# Altium PCB 175-00029 rev3, 486 CCD Interface.PcbDoc
Units mil, origin at the board's own origin, x right, y up, seen from the top; angles counter-clockwise.
Board outline 2440.94 x 2590.55 mil, 6 copper layers (Top Layer (*.GTL), Mid-Layer 1  (*.G1), Internal Plane 1 (*.GP1), Mid-Layer 2 (*.G2), Internal Plane 2 (*.GP2), Bottom Layer (*.GBL)); 44 components, 41 nets, 233 pads, 100 vias.
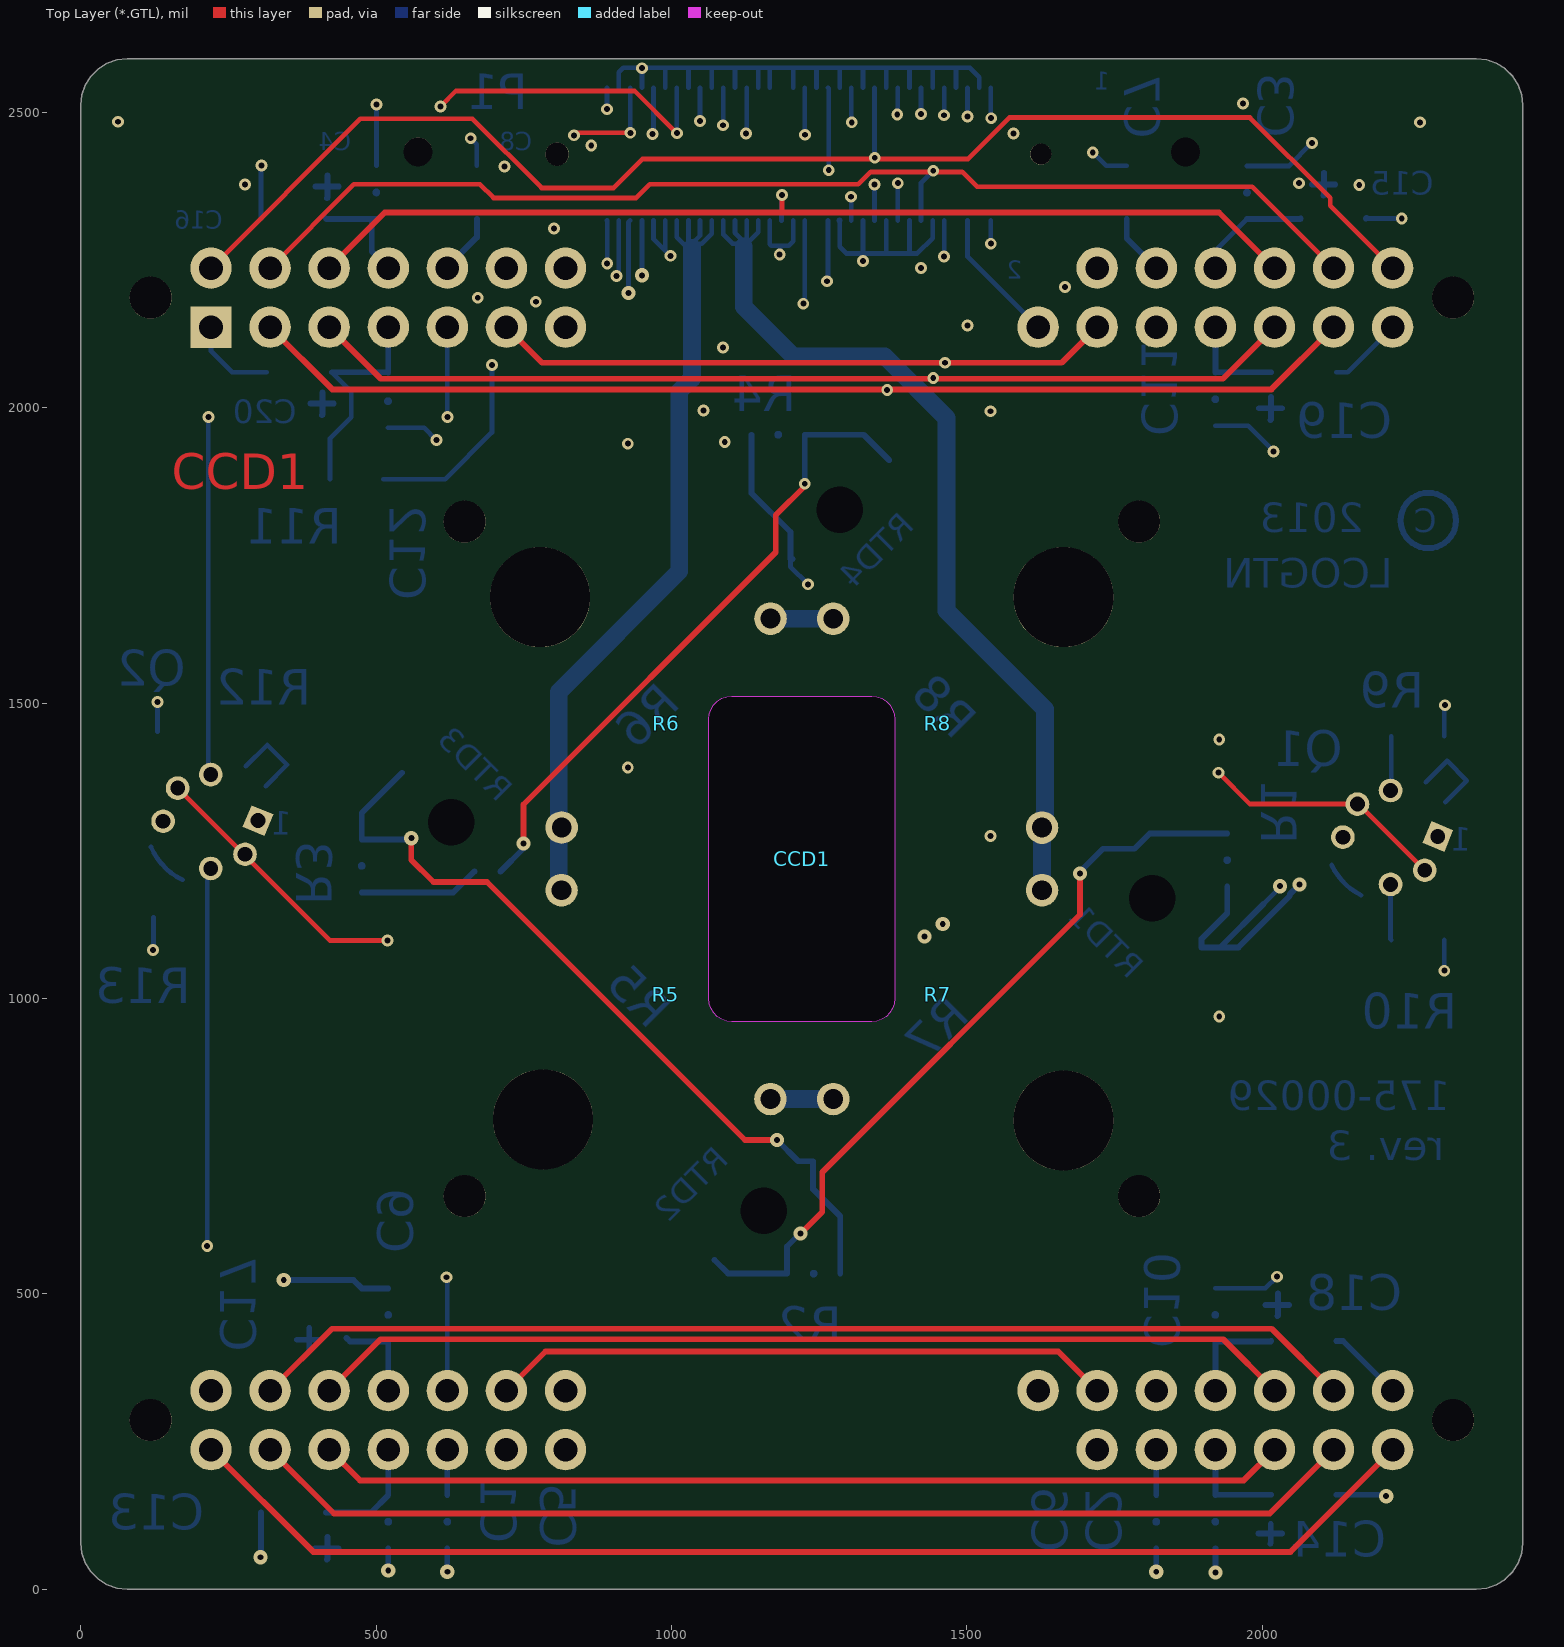
[diagram p0: Top Layer (*.GTL) view]
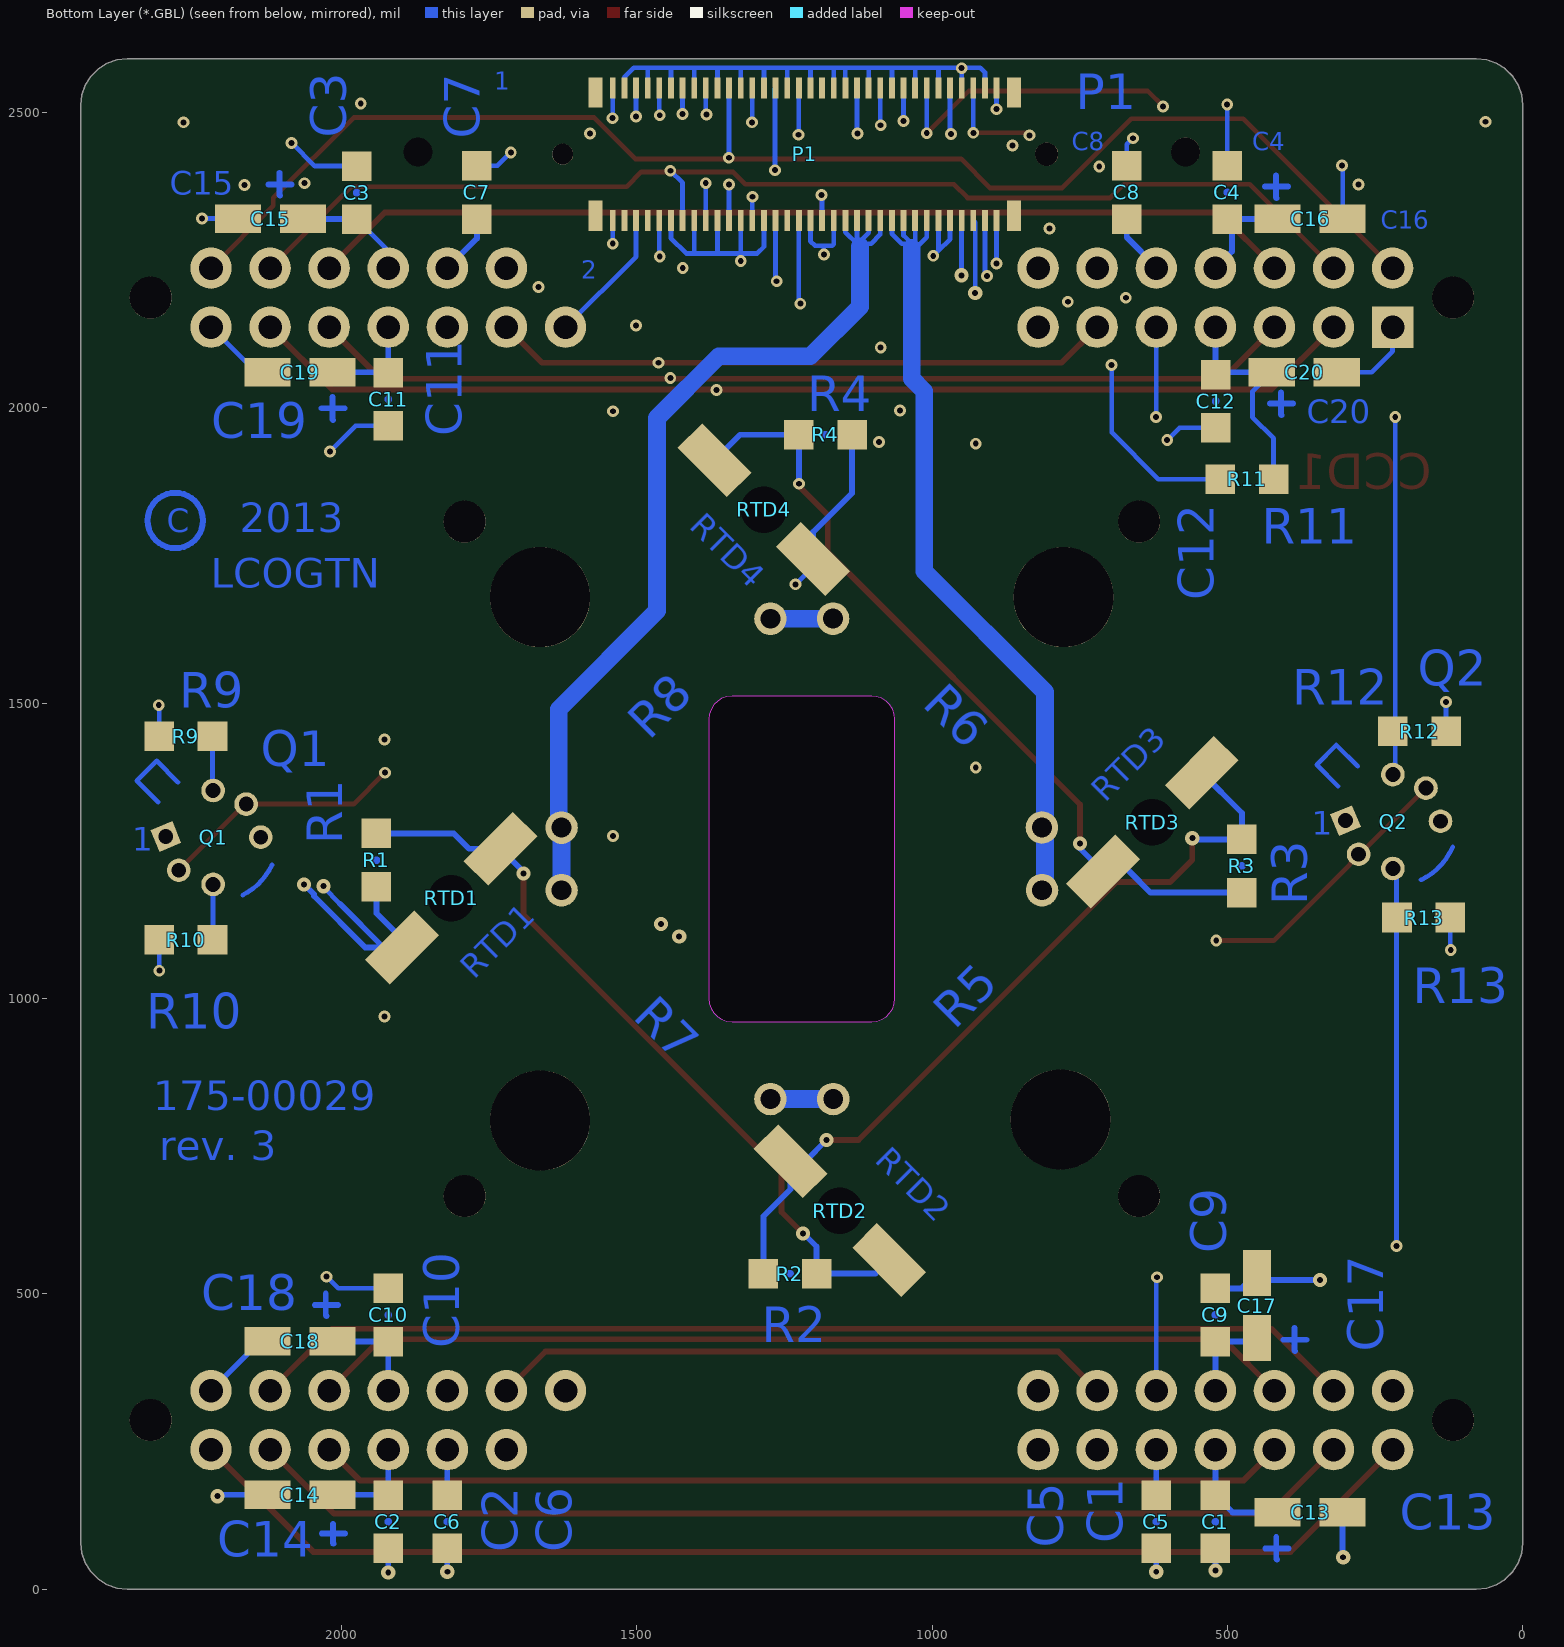
[diagram p1: Bottom Layer (*.GBL) view, seen from below]
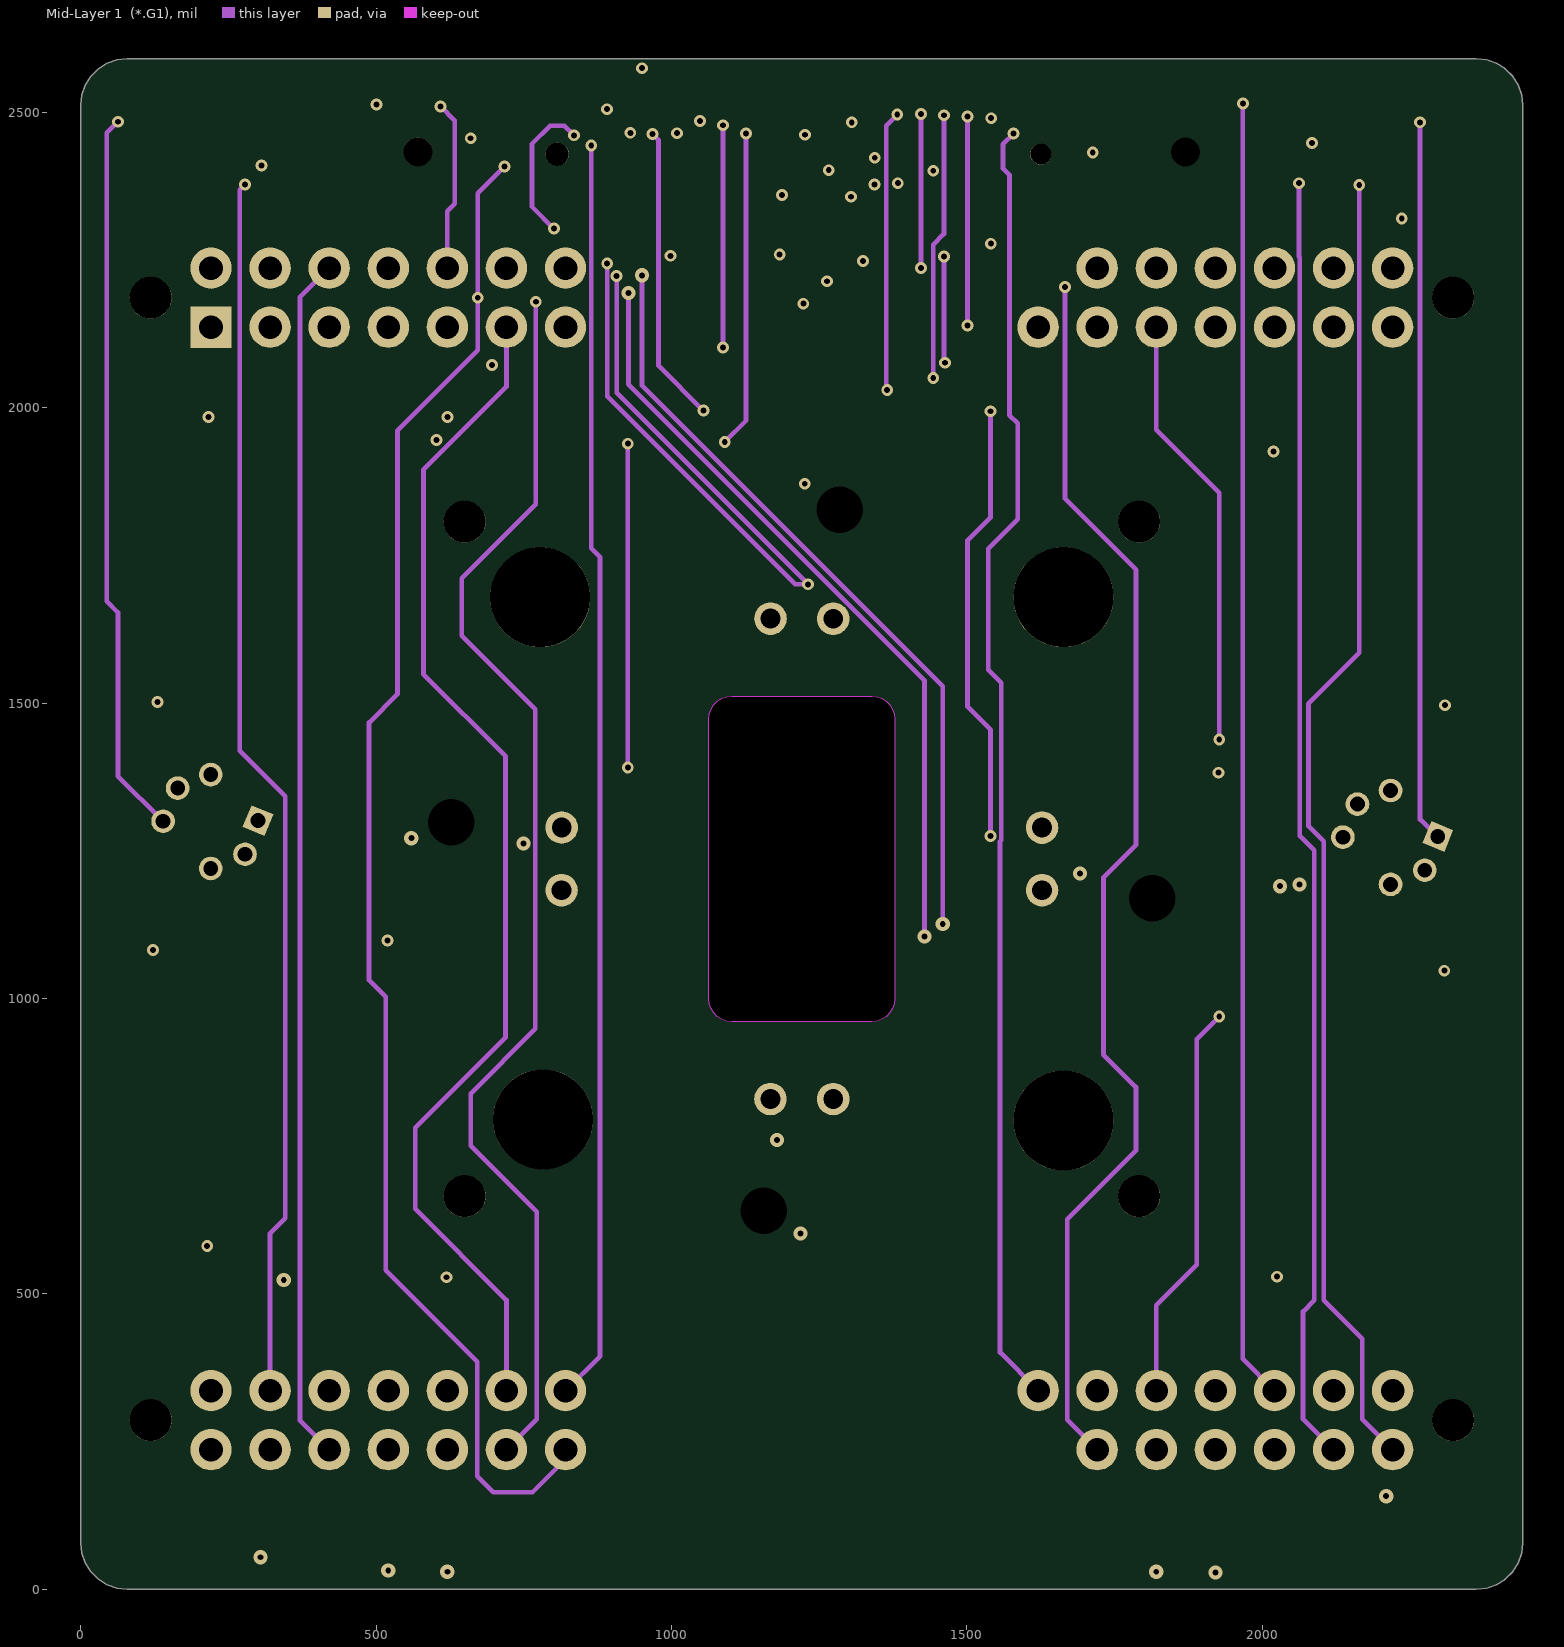
[diagram p2: Mid-Layer 1  (*.G1)]
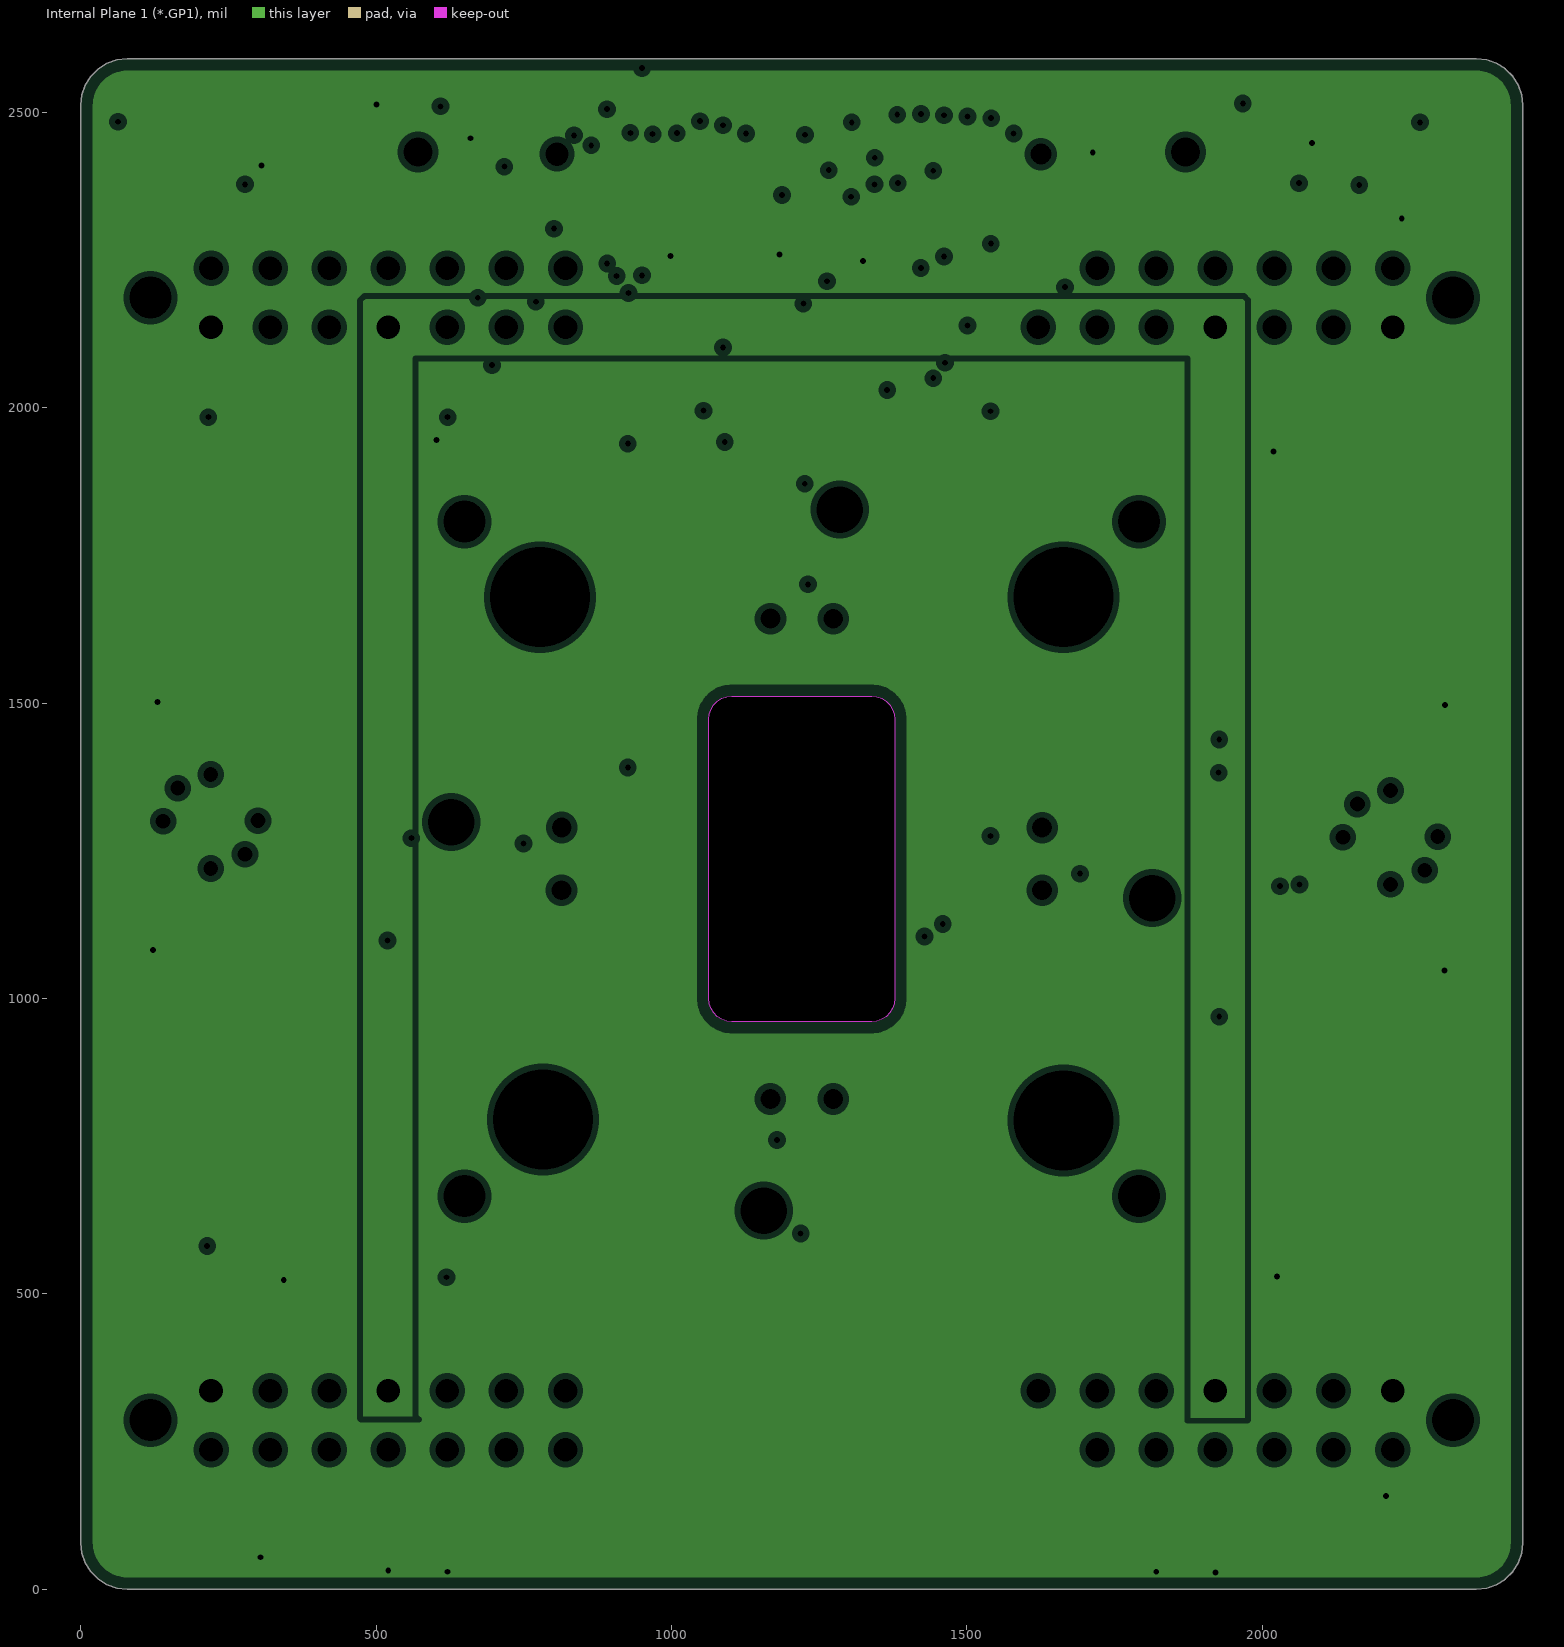
[diagram p3: Internal Plane 1 (*.GP1), clearances drawn from the general rule]
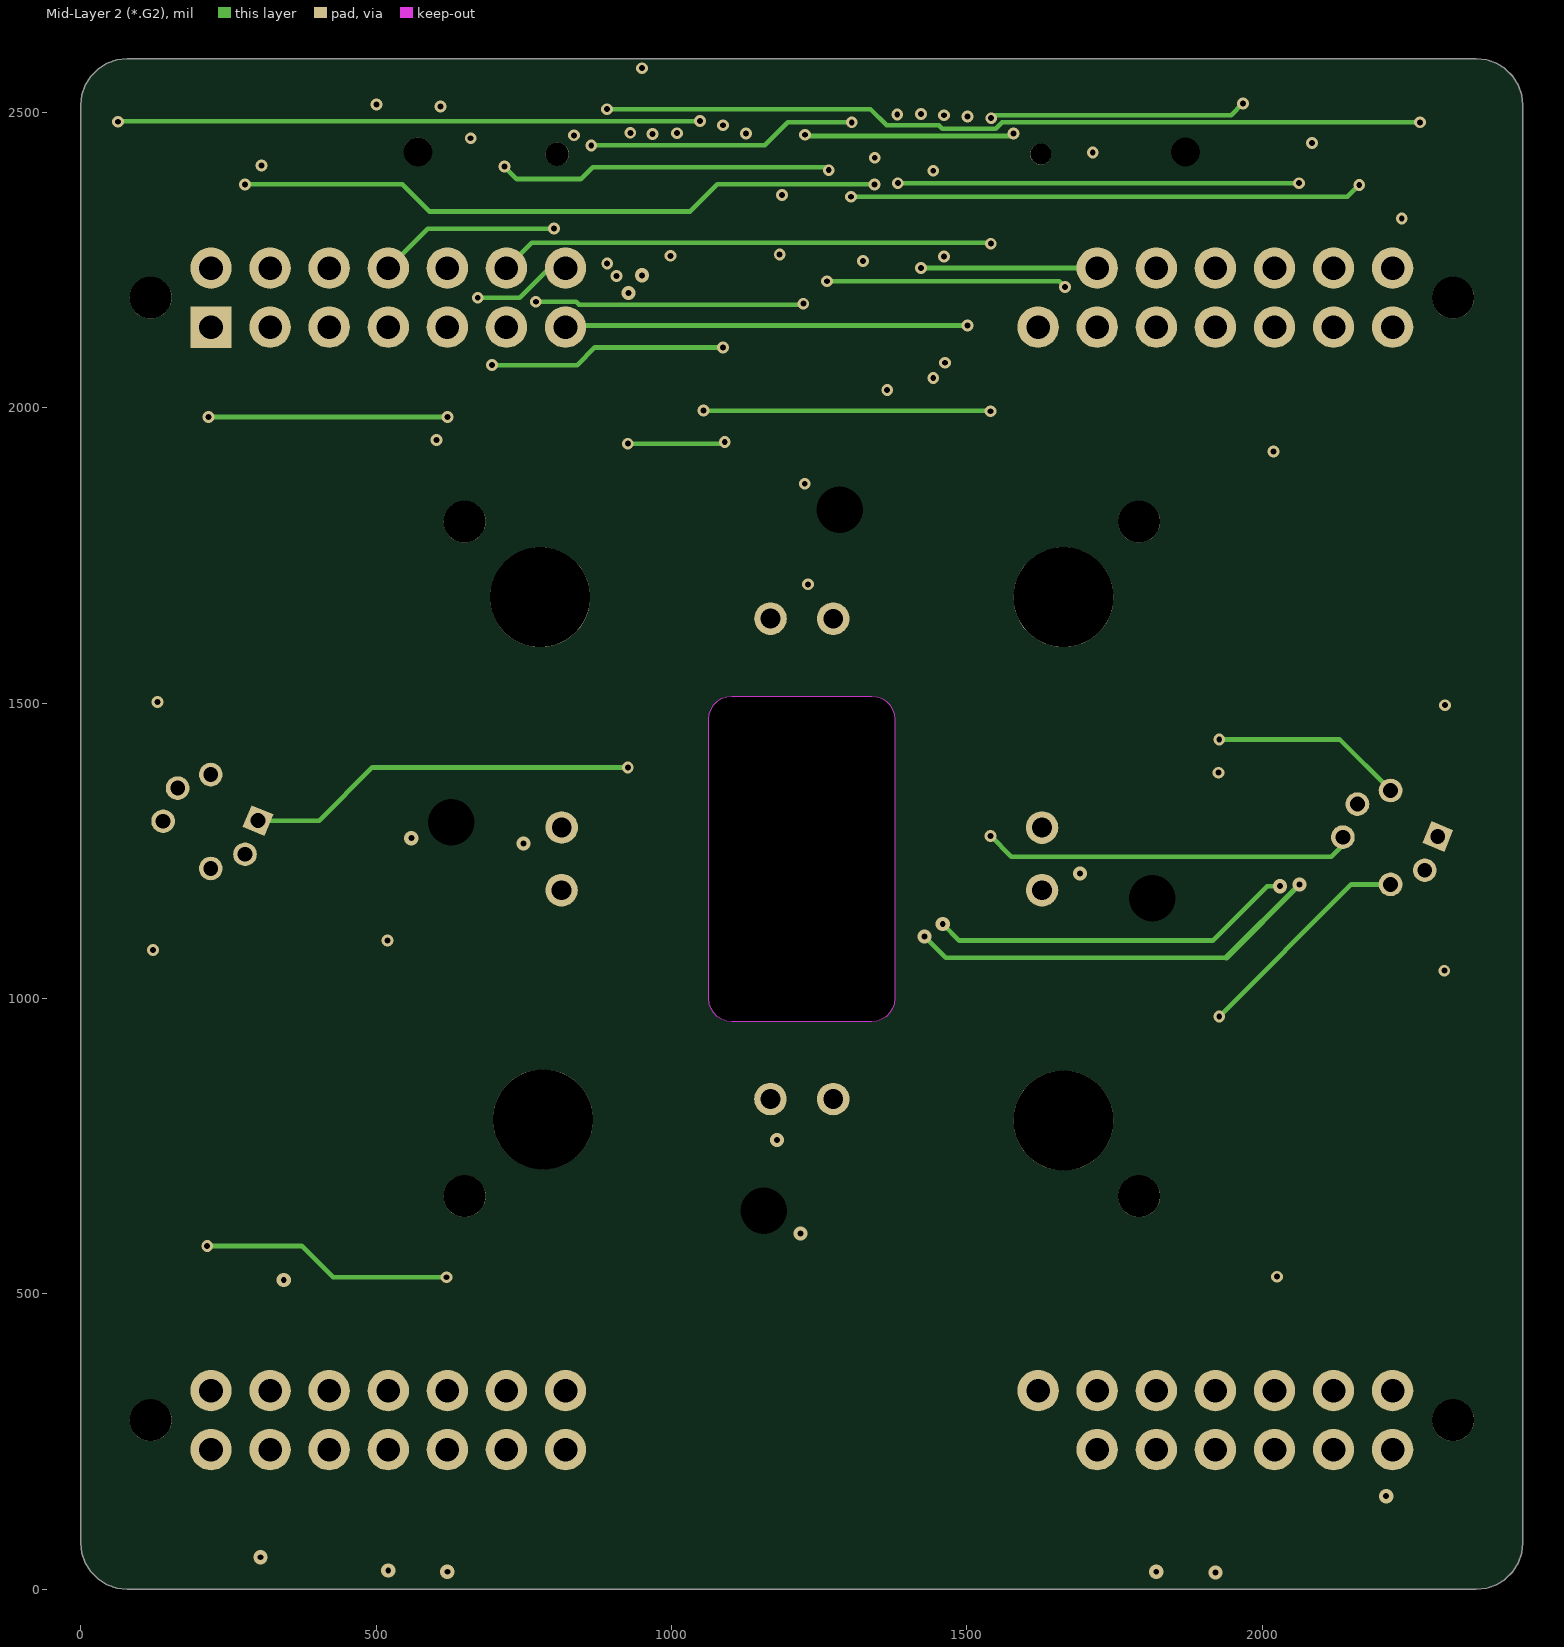
[diagram p4: Mid-Layer 2 (*.G2)]
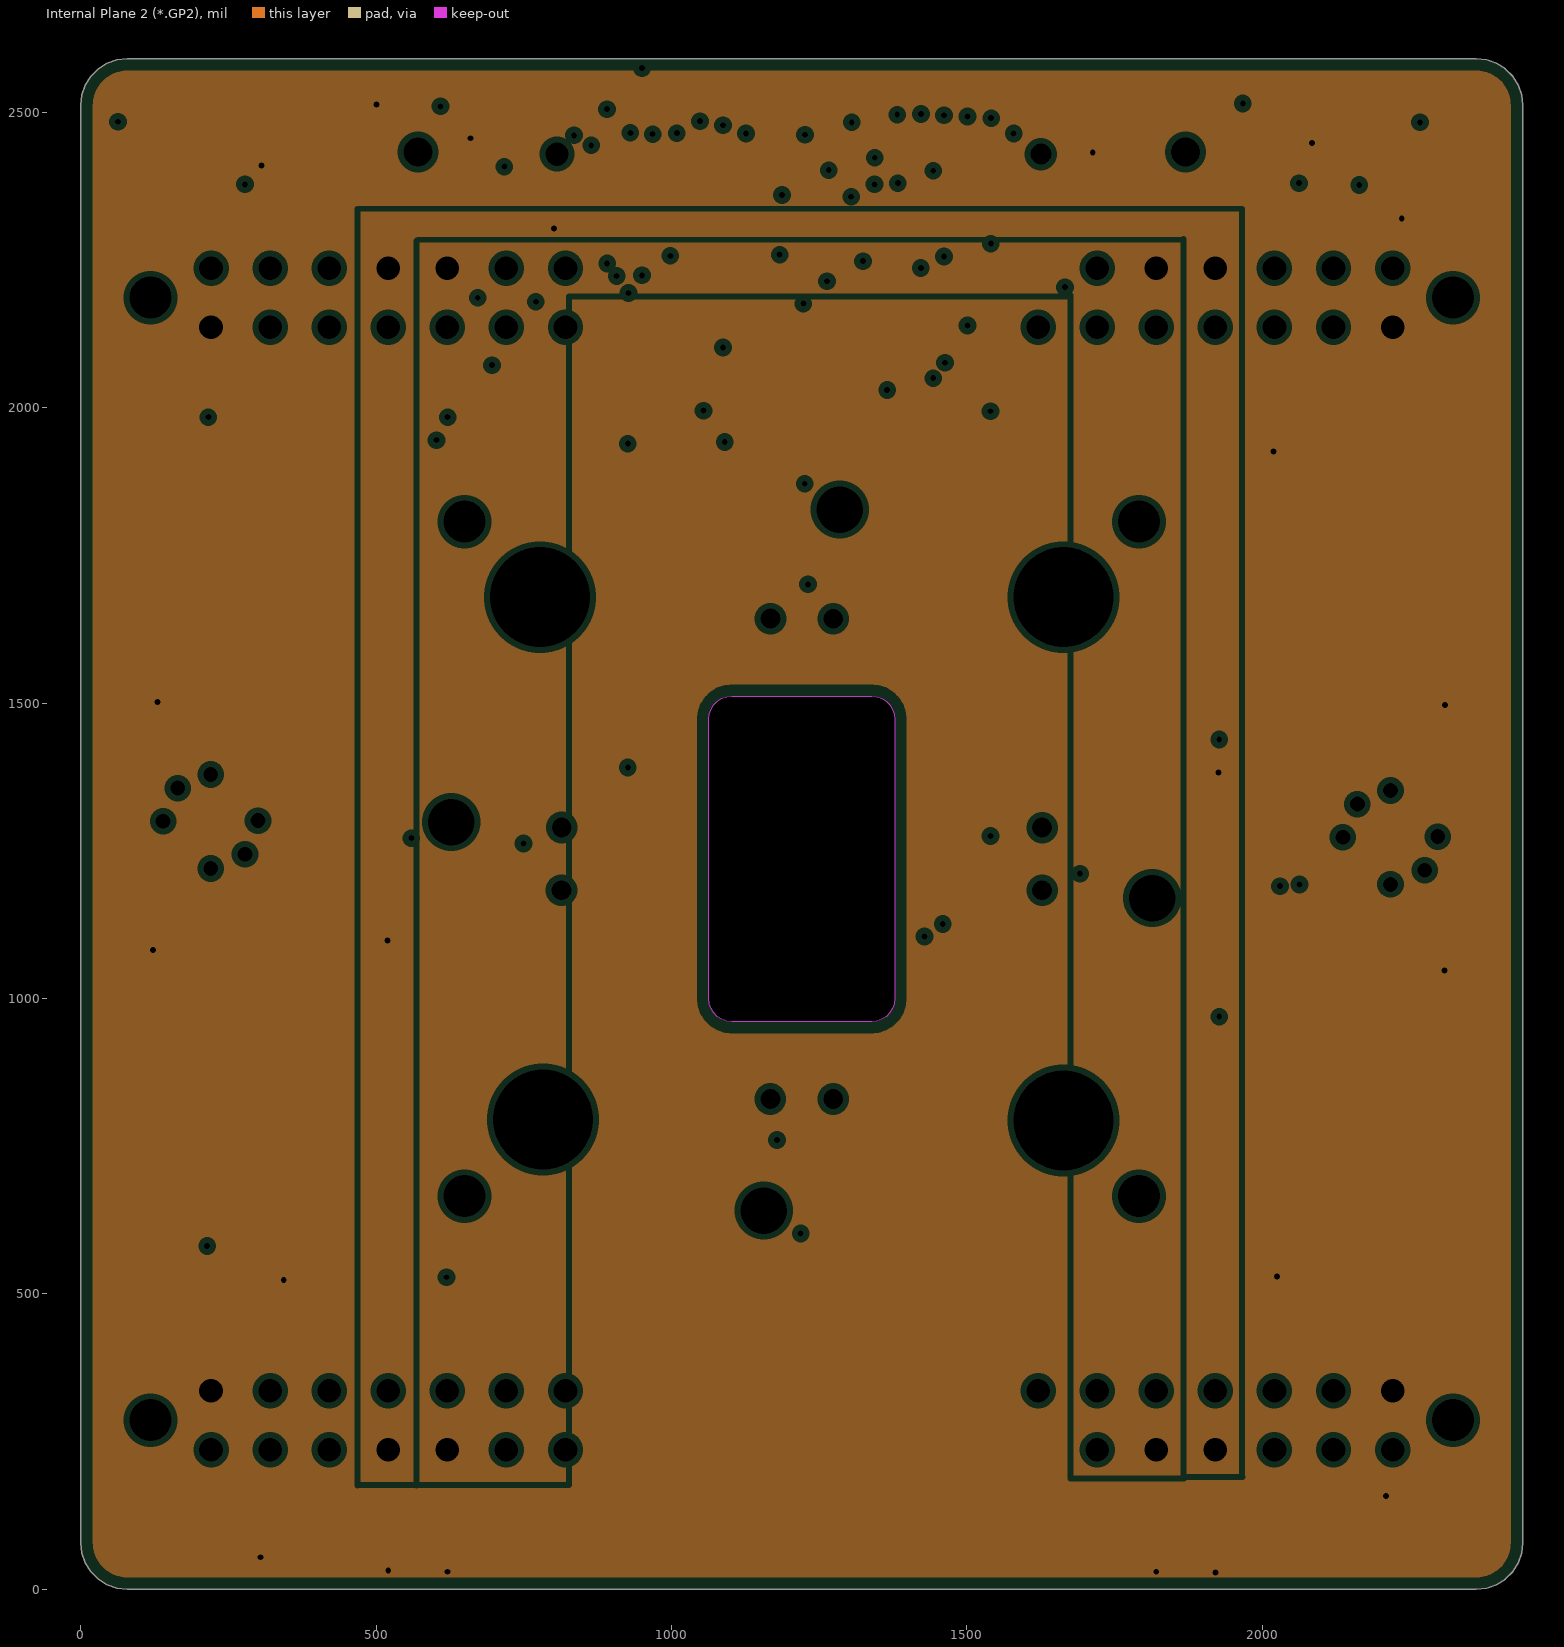
[diagram p5: Internal Plane 2 (*.GP2), clearances drawn from the general rule]

## Layer stack, top to bottom
Top Solder: solder mask 0.4, Solder Resist, Dk 3.5
Top Layer (*.GTL): signal copper 1.4
Dielectric1: core 12.6, FR-4, Dk 4.8
Mid-Layer 1  (*.G1): signal copper 1.4
Dielectric2: prepreg 12.6, FR-4, Dk 4.8
Internal Plane 1 (*.GP1): plane copper 1.4, net (Multiple Nets)
Dielectric4: core 12.6, FR-4, Dk 4.8
Mid-Layer 2 (*.G2): signal copper 1.4
Dielectric3: prepreg 12.6, FR-4, Dk 4.8
Internal Plane 2 (*.GP2): plane copper 1.4, net (Multiple Nets)
Dielectric5: core 12.6, FR-4, Dk 4.8
Bottom Layer (*.GBL): signal copper 1.4
Bottom Solder: solder mask 0.4, Solder Resist, Dk 3.5

## Board outline
78.74,2590.55 61.22,2588.58 44.58,2582.75 29.65,2573.37 17.18,2560.9 7.8,2545.98 1.97,2529.33 0,2511.81 0,78.74 1.97,61.22 7.8,44.58 17.18,29.65 29.65,17.18 44.58,7.8 61.22,1.97 78.74,0 2362.2,0 2379.73,1.97 2396.37,7.8 2411.3,17.18 2423.77,29.65 2433.15,44.58 2438.97,61.22 2440.94,78.74 2440.94,2511.81 2438.97,2529.33 2433.15,2545.98 2423.77,2560.9 2411.3,2573.37 2396.37,2582.75 2379.73,2588.58 2362.2,2590.55
cut-out: 1102.28,1511.81 1338.5,1511.81 1347.26,1510.82 1355.59,1507.91 1363.05,1503.22 1369.28,1496.99 1373.98,1489.52 1376.89,1481.2 1377.87,1472.44 1377.87,1000 1376.89,991.24 1373.98,982.92 1369.28,975.45 1363.05,969.22 1355.59,964.53 1347.26,961.62 1338.5,960.63 1102.28,960.63 1093.52,961.62 1085.2,964.53 1077.74,969.22 1071.5,975.45 1066.81,982.92 1063.9,991.24 1062.91,1000 1062.91,1472.44 1063.9,1481.2 1066.81,1489.52 1071.5,1496.99 1077.74,1503.22 1085.2,1507.91 1093.52,1510.82

## Design rules (kind name [scope] priority, off if disabled: settings)
Clearance "MSOP pad spacing" [(HasFootprint('TQFP48_m') or HasFootprint('RM-8'))] p1: gap=6
Clearance [All] p2: gap=4
ComponentClearance [(HasFootprint('AXIAL-0.5'))] p1: gap=-1000 collisioncheckmode=3 verticalgap=-1000 showdistances=TRUE
ComponentClearance "CCD Clearance" [(InComponent('CCD1')) vs (HasFootprint('AXIAL-0.5') OR HasFootprint('RTD 1x15mm'))] p2: gap=-39.37 collisioncheckmode=3 verticalgap=-1000 showdistances=FALSE
HoleSize [All] p1: absolutevalues=TRUE maxlimit=300 minlimit=1 maxpercent=80.000 minpercent=20.000
HoleSize Testpoint [All] p2: absolutevalues=TRUE maxlimit=100 minlimit=1 maxpercent=80.000 minpercent=20.000
HoleSize TestPointUsage [All] p3: absolutevalues=TRUE maxlimit=100 minlimit=1 maxpercent=80.000 minpercent=20.000
MinimumSolderMaskSliver [All] p1: minsoldermaskwidth=1
PlaneClearance [All] p1: clearance=10
PlaneConnect PlaneConnect_1 [(InNet('AGND'))] p1: planeconnectstyle=Direct reliefexpansion=20 reliefentries=4 reliefconductorwidth=10 reliefairgap=10
PlaneConnect [All] p2: planeconnectstyle=Relief reliefexpansion=20 reliefentries=4 reliefconductorwidth=10 reliefairgap=10
PolygonConnect [All] p1: connectstyle=Relief reliefconductorwidth=10 reliefentries=4 polygonreliefangle="90 Angle" airgapwidth=10
RoomDefinition "780-00033 rev 3, 486 CCD Interface" [InComponentClass('780-00033 rev 3, 486 CCD Interface')] p1: confinementstyle=ConfineIn formatcopy=TRUE lockcomponents=FALSE outline -1246.06,-489.17 3699.06,-489.17 3699.06,3050.2 -1246.06,3050.2
RoutingVias [All] p1: holewidth=10 width=24 viastyle="Through Hole" minholewidth=10 minwidth=20 maxholewidth=25 maxwidth=50
RoutingVias "Dig 5V/Gnd via" [(InNet('+5') OR InNet('D'))] p2: holewidth=28 width=50 viastyle="Through Hole" minholewidth=28 minwidth=50 maxholewidth=28 maxwidth=50
SilkToSolderMaskClearance SilkscreenOverComponentPads [IsPad] p1: minsilkscreentomaskgap=3 clearancetoexposedcopper=TRUE
SolderMaskExpansion [All] p1: expansion=2
UnpouredPolygon [All] p1: allowunpoured=FALSE
Width Width_1 [All] p1: maxlimit=50 minlimit=5 preferedwidth=8
Width [All] p2: maxlimit=50 minlimit=5 preferedwidth=10
Width "+5V/DGND trace" [(InNet('+5') OR InNet('D'))] p3: maxlimit=50 minlimit=10 preferedwidth=50 midlayer1_minwidth=50 midlayer2_minwidth=50 bottomlayer_minwidth=50 minimp=50.000000 maximp=50.000000 favimp=50.000000
23 further rules are at their usual default settings.

## Classes and differential pairs
component class "780-00033 rev 3, 486 CCD Interface": C1 C2 C3 C4 C5 C6 C7 C8 C9 C10 C11 C12 C13 C14 C15 C16 C17 C18 C19 C20 CCD1 P1 Q1 Q2 R1 R2 R3 R4 R5 R6 R7 R8 R9 R10 R11 R12 R13 RTD1 RTD2 RTD3 RTD4

## Components (designator, comment, footprint, x,y, rotation, side; value= is the part's Value field where it differs from the comment)
C1 "" SMD_0805#1 520.47,114.25 r90 bottom
C2 "" SMD_0805#1 1920.47,114.25 r90 bottom
C3 "" SMD_0805#1 1974,2364 r270 bottom
C4 "" SMD_0805#1 500.47,2364.25 r270 bottom
C5 "" SMD_0805#1 620.47,114.25 r90 bottom
C6 "" SMD_0805#1 1820.47,114.25 r90 bottom
C7 "" SMD_0805#2 1770.47,2364.25 r270 bottom
C8 "" SMD_0805#2 670.47,2364.25 r270 bottom
C9 "" SMD_0805#1 520.47,464.25 r270 bottom
C10 "" SMD_0805#1 1920.47,464.25 r270 bottom
C11 "" SMD_0805#1 1920.47,2014.25 r90 bottom
C12 "" SMD_0805#1 520,2011 r90 bottom
C13 "35V" SMD_CAP_3216 360,130 r0 bottom
C14 "35V" SMD_CAP_3216 2070,160 r180 bottom
C15 "35V" SMD_CAP_3216 2120,2320 r180 bottom
C16 "35V" SMD_CAP_3216 360,2320 r0 bottom
C17 "35V" SMD_CAP_3216 450,480 r270 bottom
C18 "35V" SMD_CAP_3216 2070,420 r180 bottom
C19 "35V" SMD_CAP_3216 2070,2060 r180 bottom
C20 "35V" SMD_CAP_3216 370,2060 r0 bottom
CCD1 "" "Fairchild 486" 220.49,2136.22 r270 top locked
Designator25 "Comment" "TARGET MECHANICAL 5" -755,-1738 r180 bottom
Designator26 "Comment" "TARGET MECHANICAL 5" -919,3247 r180 bottom
Designator27 "Comment" "TARGET MECHANICAL 5" 3367,3231 r180 bottom
P1 "" ? 1625.08,2429.13 r180 bottom locked
Q1 "IFN860" TO-71 2217,1273 r180 bottom locked
Q2 "IFN860" TO-71 220,1300 r180 bottom locked
R1 "" SMD_0805#1 1940.47,1234.25 r270 bottom
R2 "" SMD_0805#1 1240.47,534.25 r180 bottom
R3 "" SMD_0805#1 475.47,1224.25 r90 bottom
R4 "" SMD_0805#1 1180.47,1954.25 r0 bottom
R5 "" AXIAL-0.5 990.55,1006.5 r135 top
R6 "" AXIAL-0.5 990.75,1466.14 r225 top
R7 "" AXIAL-0.5 1450.39,1006.5 r225 top
R8 "" AXIAL-0.5 1450.39,1465.94 r135 top
R9 "Res 0805" SMD_0805#2 2263,1444 r180 bottom
R10 "Res 0805" SMD_0805#2 2263,1099 r180 bottom
R11 "Res 0805" SMD_0805#2 467,1879 r180 bottom
R12 "Res 0805" SMD_0805#2 175,1452 r0 bottom
R13 "Res 0805" SMD_0805#2 168,1137 r0 bottom
RTD1 "" "RTD 1x15mm" 1549.29,905.43 r225 bottom locked
RTD2 "" "RTD 1x15mm" 891.65,905.43 r135 bottom locked
RTD3 "" "RTD 1x15mm" 891.65,1563.07 r45 bottom locked
RTD4 "" "RTD 1x15mm" 1549.29,1563.07 r315 bottom

## Footprints (in the part's own frame and the unit in brackets; to place one, negate y for a bottom-side part, rotate by r counter-clockwise, add the part's x,y. Pads: shape width x height; smd on the part's side, far side on the other; paste and mask are expansions set on the pad)
AXIAL-0.5 [mm] "Axial Device, Thru-Hole; 2 Leads; 0.5 in Pin Spacing"
  round 1.4 hole 0.85: 1(-6.35,0) 2(6.35,0)
"Fairchild 486" [mil] "486 CCD"
  round 70 hole 40: A1(1900,0) A2(1900,100) A3(1900,200) A4(1900,300) A5(1900,400) A6(1900,500) A7(1900,600) A16(1900,1500) A17(1900,1600) A18(1900,1700) A19(1900,1800) A20(1900,1900) A21(1900,2000) B1(1800,0) B2(1800,100) B3(1800,200) B4(1800,300) B5(1800,400) B6(1800,500) B7(1800,600) B15(1800,1400) B16(1800,1500) B17(1800,1600) B18(1800,1700) B19(1800,1800) B20(1800,1900) B21(1800,2000) C2(0,100) C3(0,200) C4(0,300) C5(0,400) C6(0,500) C7(0,600) C15(0,1400) C16(0,1500) C17(0,1600) C18(0,1700) C19(0,1800) C20(0,1900) C21(0,2000) D1(-100,0) D2(-100,100) D3(-100,200) D4(-100,300) D5(-100,400) D6(-100,500) D7(-100,600) D16(-100,1500) D17(-100,1600) D18(-100,1700) D19(-100,1800) D20(-100,1900) D21(-100,2000)
  rect 70x70 hole 40: C1(0,0)
"RTD 1x15mm" [mm] "RTD"
  round 1.778 hole 2 unplated: 0(-9.5,0)
  rect 1.5x3 smd: 1(-9.5,3) 2(-9.5,-3)
SMD_0805#1 [mil]
  rect 50x50 smd: 1(-45,0) 2(45,0)
  Top Layer (*.GTL) circle w10: c0,0 r1.41
SMD_0805#2 [mil]
  rect 50x50 smd: 1(-45,0) 2(45,0)
SMD_CAP_3216 [mil]
  rect 78x48 smd: 1(55,0) 2(-55,0)
"TARGET MECHANICAL 5" [mil]
TO-71 [mil] "Can; 7 Leads (1 Absent); Pin Circle Dia. 2.54 mm; Lead Dia. 0.48 mm (max)"
  rect 40x40 hole 25 rot 22.5: 1(-80,1)
  round 40 hole 25: 2(-58,-56) 3(0,-80) 5(80.62,0) 6(56,56) 7(0,79)
  Top Layer (*.GTL) lines w7.87: 99.62,-47.19 cw(c0,0) 50.08,-98.2 ; -59.44,92.84 -95.62,129.03 -129.03,95.63 -92.84,59.44
? [mm] "HIROSE RECEPTACLE 68 PIN"
  round 0.9 hole 0.9 unplated: 0(0,0)
  rect 0.6x1.3 smd: 0(1.4,-2.65) 0(1.4,2.65) 0(19.4,-2.65) 0(19.4,2.65)
  round 1 hole 1 unplated: 0(20.8,0)
  rect 0.25x0.9 smd: 1(2.15,2.85) 1(2.15,2.85) 2(2.15,-2.85) 3(2.65,2.85) 4(2.65,-2.85) 5(3.15,2.85) 6(3.15,-2.85) 7(3.65,2.85) 8(3.65,-2.85) 9(4.15,2.85) 10(4.15,-2.85) 11(4.65,2.85) 12(4.65,-2.85) 13(5.15,2.85) 14(5.15,-2.85) 15(5.65,2.85) 16(5.65,-2.85) 17(6.15,2.85) 18(6.15,-2.85) 19(6.65,2.85) 20(6.65,-2.85) 21(7.15,2.85) 22(7.15,-2.85) 23(7.65,2.85) 24(7.65,-2.85) 25(8.15,2.85) 26(8.15,-2.85) 27(8.65,2.85) 28(8.65,-2.85) 29(9.15,2.85) 30(9.15,-2.85) 31(9.65,2.85) 32(9.65,-2.85) 33(10.15,2.85) 34(10.15,-2.85) 35(10.65,2.85) 36(10.65,-2.85) 37(11.15,2.85) 38(11.15,-2.85) 39(11.65,2.85) 40(11.65,-2.85) 41(12.15,2.85) 42(12.15,-2.85) 43(12.65,2.85) 44(12.65,-2.85) 45(13.15,2.85) 46(13.15,-2.85) 47(13.65,2.85) 48(13.65,-2.85) 49(14.15,2.85) 50(14.15,-2.85) 51(14.65,2.85) 52(14.65,-2.85) 53(15.15,2.85) 54(15.15,-2.85) 55(15.65,2.85) 56(15.65,-2.85) 57(16.15,2.85) 58(16.15,-2.85) 59(16.65,2.85) 60(16.65,-2.85) 61(17.15,2.85) 62(17.15,-2.85) 63(17.65,2.85) 64(17.65,-2.85) 65(18.15,2.85) 66(18.15,-2.85) 67(18.65,2.85) 68(18.65,-2.85)

## Part data
C1 C2 C3 C4 C5 C6 C7 C8 C9 C10 C11 C12: library part "Cap SMD", "Capacitor"
C13 C14 C15 C16 C17 C18 C19 C20: library part "Cap 2.2uF 35V Low ESR", "outline 3.2mm x 1.6 mm, 1206"
CCD1: library part "Fairchild 486 CCD"
P1: library part FX11LA-68S, "HIROSE 68P Receptacle"
Q1 Q2: "N-JFET NJ450L Process"
R1 R2 R3 R4 R9 R10 R11 R12 R13: library part "Res SMD", "Resistor 0805"
R5 R6 R7 R8: library part "Res TH", "Resistor"
RTD1 RTD2 RTD3 RTD4: library part "RTD 2-wire, 1x15mm", "Pt RTD"

## Free pads (board coordinates)
  round 70.87 hole 70.87 unplated: 1(118.11,286.22) 1(118.11,2186.22) 1(649.61,665.35) 1(649.61,1807.09) 1(1791.34,665.35) 1(1791.34,1807.09) 1(2322.83,2186.22) 2(2322.83,286.22)
  round 48.07 hole 49.21 unplated: 1(570.87,2433.07)
  round 169.29 hole 169.29 unplated: 1(777.56,1679.13) 1(782.4,795.28) 1(1663.39,793.31) 1(1663.39,1679.13)
  round 47.24 hole 49.21 unplated: 1(1870.08,2433.07)

## Via types
v1: diameter 20, hole 10, Top Layer (*.GTL) to Bottom Layer (*.GBL), 82 vias
v2: diameter 24, hole 10, Top Layer (*.GTL) to Bottom Layer (*.GBL), 18 vias

## Nets (pads, with @x,y where several pads share a name; then routed paths per layer and width w, separated by ;. In a path a pad name is that pad's centre, name@x,y a point inside that pad or via, vN(x,y) a via of type N, cw(c..) or ccw(c..) an arc to the next point about the centre after c; other vN are vias at no path point)
A1OUT: P1.67 Q1.1 | length 2653
  Mid-Layer 1  (*.G1) w8: v1(2267,2483) 2267,1303 Q1.1@2297,1273
  Mid-Layer 2 (*.G2) w8: v1(890.83,2505.25) 1336.75,2505.25 1364,2478 1452.54,2478 1458.54,2472 1548.46,2472 1559.46,2483 v1(2267,2483)
  Bottom Layer (*.GBL) w8: v1(890.83,2505.25) P1.67
A2OUT: P1.43 Q2.1 | length 1991.2
  Mid-Layer 1  (*.G1) w8: v1(926,1391) v1(926,1939) ; v1(1090,1942) 1126,1978 v1(1126,2464)
  Mid-Layer 2 (*.G2) w8: Q2.1 403.63,1301 493.63,1391 v1(926,1391) ; v1(926,1939) 1087,1939 v1(1090,1942)
  Bottom Layer (*.GBL) w8: v1(1126,2464) 1127.05,2465.05 P1.43
A3OUT: P1.51 Q2.5 | length 2273.4
  Mid-Layer 1  (*.G1) w8: v1(63,2484) 44,2465 44,1672.28 63,1653.28 63,1376.38 Q2.5
  Mid-Layer 2 (*.G2) w8: v1(63,2484) 64,2485 v1(1048.31,2485)
  Bottom Layer (*.GBL) w8: v1(1048.31,2485) P1.51
A4OUT: P1.59 Q1.5 | length 2447.8
  Mid-Layer 1  (*.G1) w8: v1(968,2463) 978,2453 978,2071 v1(1054,1995) ; v1(1540,1275) 1540,1454.75 1501,1493.75 1501,1775.25 1540,1814.25 v1(1540,1994)
  Mid-Layer 2 (*.G2) w8: v1(1054,1995) 1539,1995 v1(1540,1994) ; v1(1540,1275) 1575,1240 2116.73,1240 Q1.5@2142.36,1265.64
  Bottom Layer (*.GBL) w8: v1(968,2463) 969.57,2464.57 P1.59
AGND: C1.1 C2.1 C3.1 C4.1 C5.1 C6.1 C7.1 C8.1 C9.1 C10.1 C11.1 C12.1 C13.2 C14.2 C15.2 C16.2 C17.2 C18.2 C19.2 C20.2 CCD1.B1 CCD1.B21 CCD1.C1 CCD1.C21 P1.3 P1.7 P1.11 P1.12 P1.15 P1.16 P1.19 P1.20 P1.23 P1.24 P1.27 P1.28 P1.31 P1.35 P1.36 P1.39 P1.40 P1.41 P1.45 P1.49 P1.53 P1.57 P1.58 P1.60 P1.61 P1.65 R9.1 R10.1 R12.1 R13.1 | length 3788.5
  Bottom Layer (*.GBL) w8: v1(122,1082) 123,1083 R13.1 ; R12.1 v1(130,1502) ; CCD1.C1 220.49,2095.51 256,2060 C20.2 ; C16.2 305,2409 v1(306,2410) ; C4.1 v1(500.47,2513) ; C12.1 581,1966 v1(602,1945) ; v1(660,2456) 670.47,2445.53 C8.1 ; P1.65 910.51,2567.51 918.23,2575.23 1505.01,2575.23 1520.75,2559.49 P1.3 ; P1.61 v1(949.88,2574.61) ; P1.60 969.57,2285.43 989.25,2265.75 ; P1.58 989.25,2265.75 ; P1.57 989.25,2574.61 ; v1(998,2257) 989.25,2265.75 ; P1.53 1028.62,2574.61 ; P1.49 1067.99,2574.61 ; P1.45 1107.36,2574.61 ; P1.41 1146.73,2574.61 ; P1.40 1166.42,2276.58 1169,2274 1183.5,2274 ; P1.39 1166.42,2574.61 ; v1(1183,2259) 1183.5,2259.5 1183.5,2274 ; P1.36 1205.79,2281.79 1198,2274 1183.5,2274 ; P1.35 1205.79,2574.61 ; P1.31 1245.16,2574.61 ; P1.28@1284.47,2316.87 1284.47,2272.53 1296,2261 1323.9,2261 ; P1.27 1284.53,2574.61 ; v1(1323.9,2248) 1323.9,2261 ; P1.24 1323.9,2261 ; P1.23 1323.9,2574.61 ; 1363.27,2262.27 P1.20 ; P1.19 1363.27,2574.61 ; 1402.64,2261.64 P1.16 ; P1.15 1402.64,2574.61 ; P1.12 1442.01,2287.01 1416,2261 1323.9,2261 ; P1.11 1442.01,2574.61 ; P1.7 1481.38,2574.61 ; v1(1713,2432) 1735.75,2409.25 C7.1 ; C10.1 2005.25,509.25 v1(2025,529) ; C11.1 1975.75,1969.25 v1(2019,1926) ; C3.1 2045,2409 v1(2084,2448) ; C19.2 2144.27,2060 CCD1.C21 ; C15.2 v1(2236,2320) ; v1(2308,1047) R10.1 ; R9.1 2308,1495.42 v1(2309,1496.42)
  Bottom Layer (*.GBL) w9.84: v2(304.13,54.13) 305,55 C13.2 ; v2(343.5,523.62) 461.38,523.62 475.75,509.25 C9.1 ; v2(520.47,31.5) C1.1 ; v2(620.47,29.53) C5.1 ; v2(1820.47,29.53) C6.1 ; v2(1920.47,28.54) C2.1 ; C14.2 2207.13,160 v2(2209.65,157.48) ; C18.2 2136.71,420 CCD1.B21 ; C15.2 C15.2@2176.57,2321.57
  Bottom Layer (*.GBL) w10: P1.28@1284.47,2316.87 P1.28
HEATER(+): P1.50 P1.52 P1.54 P1.56 R5.2 R6.2 | length 1408.3
  Bottom Layer (*.GBL) w8: P1.56 1008.94,2288.31 1026.57,2270.67 1034.45,2270.67 ; P1.54 1028.62,2276.5 1034.45,2270.67 ; P1.52 1048.31,2291.42 1034.45,2277.56 ; P1.50 1067.99,2294.37 1051.18,2277.56 1034.45,2277.56 ; 1034.45,2270.67 1034.45,2277.56
  Bottom Layer (*.GBL) w10: R5.2 R5.2@813.97,1183.47
  Bottom Layer (*.GBL) w30: R5.2 808.85,1188.19 808.85,1518.63 1013.22,1723 1013.22,2027.98 1034.45,2049.21 1034.45,2270.67
HEATER(-): P1.42 P1.44 P1.46 P1.48 R7.1 R8.1 | length 1598.6
  Bottom Layer (*.GBL) w8: P1.48 1087.68,2293.23 1103.27,2277.64 1125.91,2277.64 ; P1.46 1107.36,2296.18 1125.91,2277.64 ; 1122.05,2272.64 1127.05,2277.64 ; P1.44 1127.05,2277.64 ; P1.42 1146.73,2297.32 1127.05,2277.64 ; 1125.91,2277.64 1127.05,2277.64
  Bottom Layer (*.GBL) w30: 1122.05,2272.64 1122.05,2170.95 1206,2087 1361,2087 1465.47,1982.53 1465.47,1656.25 1632.09,1489.63 R8.1@1632.09,1292.32 ; R7.1 R8.1
NetCCD1_B5: CCD1.B5 Q2.3 R13.2 | length 1260.8
  Mid-Layer 2 (*.G2) w8: v1(214,581) 374,581 427,528 v1(619,528)
  Bottom Layer (*.GBL) w8: v1(214,581) 214,1214 Q2.3 ; v1(619,528) 620.49,526.51 CCD1.B5
NetCCD1_B17: CCD1.B17 Q1.3 R10.2 | length 1154.2
  Mid-Layer 1  (*.G1) w8: CCD1.B17 1820.49,480.49 1889,549 1889,931.22 v1(1927,969.22)
  Mid-Layer 2 (*.G2) w8: v1(1927,969.22) 2150.78,1193 Q1.3
  Bottom Layer (*.GBL) w8: Q1.3 2217,1100 R10.2
NetCCD1_C5: CCD1.C5 Q2.7 R12.2 | length 1164.1
  Mid-Layer 2 (*.G2) w8: v1(216,1984) v1(621,1984)
  Bottom Layer (*.GBL) w8: v1(216,1984) 216,1383 Q2.7 ; CCD1.C5 620.49,1984.51 v1(621,1984)
NetCCD1_C17: CCD1.C17 Q1.7 R9.2 | length 1160.1
  Mid-Layer 1  (*.G1) w8: CCD1.C17 1820.49,1962.51 1927,1856 v1(1927,1438.39)
  Mid-Layer 2 (*.G2) w8: v1(1927,1438.39) 2130.61,1438.39 Q1.7
  Bottom Layer (*.GBL) w8: Q1.7 2218,1353 R9.2
NetP1_47: P1.47 R11.1 | length 1173.8
  Mid-Layer 1  (*.G1) w8: v1(1087,2102) v1(1087,2478)
  Mid-Layer 2 (*.G2) w8: v1(696,2072) 840,2072 870,2102 v1(1087,2102)
  Bottom Layer (*.GBL) w8: R11.1 617,1879 696,1958 v1(696,2072) ; v1(1087,2478) 1087.68,2478.68 P1.47
NetR1_1: R1.1 R2.2 RTD1.1 RTD2.2 | length 1294.7
  Top Layer (*.GTL) w9.84: v2(1218.47,602.25) 1254.92,638.7 1254.92,705.7 1691.47,1142.25 v2(1691.47,1211.25)
  Bottom Layer (*.GBL) w9.84: RTD2.2 1095.8,534.25 R2.2 1195.47,580.25 1217.47,602.25 v2(1218.47,602.25) ; v2(1691.47,1211.25) 1691.47,1214.65 RTD1.1 1783.64,1253.42 1809.47,1279.25 R1.1
NetR2_1: R2.1 R3.2 RTD2.1 RTD3.2 | length 1363.3
  Top Layer (*.GTL) w9.84: v2(559.47,1271.25) 559.47,1234.53 597,1197 687.72,1197 1124.47,760.25 v2(1178.47,760.25)
  Bottom Layer (*.GBL) w9.84: RTD3.2 475.47,1313.92 R3.2 557.47,1269.25 v2(559.47,1271.25) ; v2(1178.47,760.25) 1214.24,724.48 RTD2.1 1239.64,677.09 1285.47,631.25 R2.1
NetR3_1: R3.1 R4.2 RTD3.1 RTD4.2 | length 1317.7
  Top Layer (*.GTL) w9.84: v2(749.47,1262.25) 749.47,1328.25 1176.47,1755.25 1176.47,1818.25 v1@1227.47,1869.25
  Bottom Layer (*.GBL) w9.84: R3.1 630.47,1179.25 666.31,1215.09 ; RTD3.1 749.47,1253.86 v2(749.47,1262.25) ; v1(1225.47,1871.25) R4.2 1325.14,1954.25 RTD4.2
NetR5_1: R5.1 R7.2 | length 106.3
  Bottom Layer (*.GBL) w30: R5.1 R7.2
NetR6_1: R6.1 R8.2 | length 108.1
  Bottom Layer (*.GBL) w30: R6.1 R8.2@1275.59,1642.92
P1A: CCD1.A1 CCD1.A21 P1.26 | length 5287.2
  Top Layer (*.GTL) w9.84: CCD1.A1 393.46,63.25 2047.52,63.25 CCD1.A21
  Mid-Layer 1  (*.G1) w8: v1(2164,2377) 2164,1585 2078,1499 2078,1292 2104,1266 2104,489 2169,424 2169,287.71 CCD1.A21
  Mid-Layer 2 (*.G2) w8: v1(1304,2357) 2144,2357 v1(2164,2377)
  Bottom Layer (*.GBL) w8: v1(1304,2357) 1304.21,2356.79 P1.26
P1B: CCD1.D1 CCD1.D21 P1.21 | length 2434.3
  Top Layer (*.GTL) w8: CCD1.D1 473.27,2489 663,2489 780,2372 902,2372 951,2421 1502,2421 1572,2491 1979,2491 2115,2355 2115,2341.71 CCD1.D21
  Bottom Layer (*.GBL) w8: P1.21 1343.58,2423.42 v1(1344,2423)
P2A: CCD1.B2 CCD1.B20 P1.22 | length 5147.6
  Top Layer (*.GTL) w9.84: CCD1.B2 425.27,441 2015.71,441 CCD1.B20
  Mid-Layer 1  (*.G1) w8: v1(278,2378) 269,2369 269,1419 346,1342 346,628 320.49,602.49 CCD1.B2
  Mid-Layer 1  (*.G1) w9.84: CCD1.B20 CCD1.B20@2120.49,344.27
  Mid-Layer 2 (*.G2) w8: v1(278,2378) 544.4,2378 590.4,2332 1031.19,2332 1077.19,2378 v1(1343.58,2378)
  Bottom Layer (*.GBL) w8: P1.22 v1(1343.58,2378)
P2B: CCD1.C2 CCD1.C20 P1.17 | length 2407.4
  Top Layer (*.GTL) w9.84: CCD1.C2 425.71,2031 2015.27,2031 CCD1.C20
  Mid-Layer 1  (*.G1) w8: v1(1365,2030) 1363.27,2031.73 1363.27,2477.27 v1(1382,2496)
  Bottom Layer (*.GBL) w8: v1(1382,2496) 1382.95,2496.95 P1.17
P3A: CCD1.A2 CCD1.A20 P1.18 | length 4815.3
  Top Layer (*.GTL) w9.84: CCD1.A2 428.46,128.25 2012.52,128.25 CCD1.A20
  Mid-Layer 1  (*.G1) w8: v1(2062,2380) 2062,2255.52 2063.49,2254.03 2063.49,1274.98 2088,1250.47 2088,489 2069,470 2069,287.71 CCD1.A20
  Mid-Layer 2 (*.G2) w8: v1(1383,2380) v1(2062,2380)
  Bottom Layer (*.GBL) w8: P1.18 1382.95,2379.95 v1(1383,2380)
P3B: CCD1.D2 CCD1.D20 P1.14 | length 2046.5
  Top Layer (*.GTL) w8: CCD1.D2 462.27,2378 675.7,2378 698.7,2355 940,2355 963,2378 1316,2378 1337,2399 1492.18,2399 1517.18,2374 1982.71,2374 CCD1.D20
  Bottom Layer (*.GBL) w8: P1.14 1422.32,2380.32 v1(1443,2401)
RG: CCD1.A3 CCD1.A19 CCD1.D3 CCD1.D19 P1.38 | length 5461.1
  Top Layer (*.GTL) w8: 1187,2330.25 v1(1187,2360)
  Top Layer (*.GTL) w9.84: CCD1.A3 472.46,184.25 1968.52,184.25 CCD1.A19 ; CCD1.D3 514.52,2330.25 1187,2330.25 1926.46,2330.25 CCD1.D19
  Mid-Layer 1  (*.G1) w8: CCD1.A3 371,285.71 371,2186.73 CCD1.D3
  Mid-Layer 1  (*.G1) w9.84: CCD1.A3 CCD1.A3@420.49,239.23
  Bottom Layer (*.GBL) w8: P1.38 1186.1,2360.9 v1(1187,2360)
  Bottom Layer (*.GBL) w9.84: CCD1.D3@420.49,2224.06 CCD1.D3 ; CCD1.D19@2011.54,2236.22 CCD1.D19
RTDF(+): P1.62 P1.64 R1.2 RTD1.2 | length 4622.7
  Mid-Layer 1  (*.G1) w8: v2(927,2194) 927,2039.63 1428,1538.63 v2(1428,1105) ; v2(950,2224) 950,2037.46 1459,1528.46 v2(1459,1126)
  Mid-Layer 2 (*.G2) w8: v2(1428,1105) 1464,1069 1939,1069 ; v2(1459,1126) 1487,1098 1916,1098 2008,1190 v2(2030,1190)
  Mid-Layer 2 (*.G2) w9.84: 1939,1069 v2(2063,1193)
  Bottom Layer (*.GBL) w8: v2(927,2194) 927,2313.73 P1.64 ; P1.62 950,2316.81 v2(950,2224) ; 2002.2,1160.2 2030,1188 v2(2030,1190)
  Bottom Layer (*.GBL) w9.84: R1.2 1940.47,1144.21 1897.28,1101.02 RTD1.2 RTD1.2@1928.39,1086.39 ; 2002.2,1160.2 RTD1.2@1928.39,1086.39 ; v2(2063,1193) 2046.26,1176.26 2046.26,1173.26 1959.39,1086.39 RTD1.2@1928.39,1086.39
RTDF(-): P1.66 P1.68 R4.1 RTD4.1 | length 1817.8
  Mid-Layer 1  (*.G1) w8: v1(891,2244) 891,2019 1209,1701 v1(1231,1701) 907,2025 v1(907,2223)
  Bottom Layer (*.GBL) w8: P1.68 891,2316.76 v1(891,2244) ; v1(907,2223) 910.51,2226.51 P1.66 ; RTD4.1 1201.31,1730.69 v1(1231,1701)
  Bottom Layer (*.GBL) w9.84: R4.1 1135.47,1855.25 1201.31,1789.42 RTD4.1
  Bottom Layer (*.GBL) w10: RTD4.1 RTD4.1@1204.98,1744.02
S1Q1: CCD1.A16 P1.30 | length 2643.1
  Mid-Layer 1  (*.G1) w8: v1(1666,2204) 1666,1846 1786.27,1725.73 1786.27,1259.92 1731,1204.65 1731,905 1786,850 1786,742 1670,626 1670,286.71 CCD1.A16
  Mid-Layer 2 (*.G2) w8: v1(1263,2214) 1656,2214 v1(1666,2204)
  Bottom Layer (*.GBL) w8: v1(1263,2214) 1264.84,2215.84 P1.30
S1Q2: CCD1.A6 P1.34 | length 2757.2
  Mid-Layer 1  (*.G1) w8: CCD1.A6 772,287.73 772,639 660,751 660,839 769.47,948.47 769.47,1489.53 645,1614 645,1711 770.22,1836.22 v1(770.22,2179.22)
  Mid-Layer 2 (*.G2) w8: v1(770.22,2179.22) 838.3,2179.22 843.52,2174 1221,2174 v1(1223,2176)
  Bottom Layer (*.GBL) w8: v1(1223,2176) 1225.47,2178.47 P1.34
S1Q3: CCD1.D6 P1.2 | length 877.8
  Mid-Layer 2 (*.G2) w8: CCD1.D6 763.49,2279.22 1538.77,2279.22 v1(1540.43,2277.56)
  Bottom Layer (*.GBL) w8: v1(1540.43,2277.56) P1.2
S1Q4: CCD1.D16 P1.13 | length 603.7
  Mid-Layer 1  (*.G1) w8: v1(1422,2236.22) 1422.32,2236.54 v1(1422.32,2497)
  Mid-Layer 2 (*.G2) w8: v1(1422,2236.22) CCD1.D16
  Bottom Layer (*.GBL) w8: v1(1422.32,2497) P1.13
S2Q1: CCD1.B15 P1.33 | length 2639.7
  Mid-Layer 1  (*.G1) w8: v1(1579,2464) 1561,2446 1561,2405 1572,2394 1572,1987.46 1586,1973.46 1586,1811 1536,1761 1536,1556 1558,1534 1558,1267.54 1556,1265.54 1556,400.71 CCD1.B15
  Mid-Layer 1  (*.G1) w10: CCD1.B15 CCD1.B15@1620.49,337.9
  Mid-Layer 2 (*.G2) w8: v1(1226,2462) 1228,2460 1575,2460 v1(1579,2464)
  Bottom Layer (*.GBL) w8: P1.33 1225.47,2462.53 v1(1226,2462)
S2Q2: CCD1.B7 P1.25 | length 2654
  Mid-Layer 1  (*.G1) w8: CCD1.B7 879,394.73 879,1747 864,1762 v1(864,2444)
  Mid-Layer 2 (*.G2) w8: v1(864,2444) 1158,2444 1197,2483 v1(1305,2483)
  Bottom Layer (*.GBL) w8: P1.25 1304.21,2483.79 v1(1305,2483)
S2Q3: CCD1.C7 P1.5 | length 1095.4
  Top Layer (*.GTL) w9.84: CCD1.C7 CCD1.C7@828.52,2144.25
  Mid-Layer 1  (*.G1) w8: v1(1501,2139) v1(1501,2493)
  Mid-Layer 2 (*.G2) w8: CCD1.C7 823.27,2139 v1(1501,2139)
  Bottom Layer (*.GBL) w8: v1(1501,2493) 1501.06,2493.06 P1.5
S2Q4: CCD1.C15 P1.6 | length 230.2
  Bottom Layer (*.GBL) w8: P1.6 1501.06,2255.65 CCD1.C15
S3: CCD1.A7 CCD1.D7 P1.29 | length 3464.9
  Mid-Layer 1  (*.G1) w8: v1(717,2408) 672,2363 v1(672,2186) 672,2097 536,1961 536,1515 488,1467 488,1031 516,1003 516,540 671,385 671,191.17 698.17,164 764.63,164 820.49,219.86 CCD1.A7
  Mid-Layer 2 (*.G2) w8: v1(672,2186) 743,2186 793.22,2236.22 CCD1.D7 ; v1(717,2408) 738,2387 846.39,2387 866.39,2407 1261,2407 v1(1266,2402)
  Bottom Layer (*.GBL) w8: P1.29 1266,2540.18 v1(1266,2402)
SG: CCD1.B6 CCD1.B16 CCD1.C6 CCD1.C16 P1.10 | length 4389.8
  Top Layer (*.GTL) w9.84: CCD1.B6 786.52,402.25 1654.46,402.25 CCD1.B16 ; CCD1.C6 780.71,2076 v1(1463,2076) 1660.27,2076 CCD1.C16
  Mid-Layer 1  (*.G1) w8: CCD1.B6 720.49,489.51 566,644 566,781 719,934 719,1410 580,1549 580,1895 720.49,2035.49 CCD1.C6 ; v1(1461,2256) 1461,2078 v1(1463,2076)
  Bottom Layer (*.GBL) w8: v1(1461,2256) 1461.69,2256.69 P1.10
TGA: CCD1.B3 CCD1.B19 P1.1 | length 4360.8
  Top Layer (*.GTL) w9.84: CCD1.B3 507.27,423 1933.71,423 CCD1.B19
  Mid-Layer 1  (*.G1) w8: v1(1967,2515) 1967,389.71 CCD1.B19
  Mid-Layer 2 (*.G2) w8: v1(1541,2490) 1546,2495 1947,2495 v1(1967,2515)
  Bottom Layer (*.GBL) w8: P1.1@1540.43,2541.34 1540.43,2490.57 v1(1541,2490)
TGB: CCD1.C3 CCD1.C19 P1.9 | length 2171.3
  Top Layer (*.GTL) w9.84: CCD1.C3 507.71,2049 1933.27,2049 CCD1.C19
  Mid-Layer 1  (*.G1) w8: v1(1443,2050) 1443,2276 1461,2294 v1(1461,2495)
  Bottom Layer (*.GBL) w8: v1(1461,2495) 1461.69,2495.69 P1.9
VOD: C1.2 C2.2 C3.2 C4.2 C13.1 C14.1 C15.1 C16.1 CCD1.A4 CCD1.A18 CCD1.D4 CCD1.D18 P1.63 Q1.2 Q1.6 Q2.2 Q2.6 | length 2363.4
  Top Layer (*.GTL) w8: Q2.6 422,1098 v1(519,1098) ; v1(835,2461) 839.2,2465.2 v1(930.2,2465.2) ; v1(1926,1382.12) 1979.12,1329 Q1.6 ; Q1.6@2163,1329 Q1.2
  Mid-Layer 1  (*.G1) w8: v1(801,2303) 763.78,2340.22 763.78,2446.78 794.27,2477.27 818.73,2477.27 v1(835,2461)
  Mid-Layer 2 (*.G2) w8: CCD1.D4 587.27,2303 v1(801,2303)
  Bottom Layer (*.GBL) w8: v1(930.2,2465.2) P1.63 ; CCD1.D18 1920.49,2265.49 C3.2
  Bottom Layer (*.GBL) w9.84: C16.1 415.75,2319.25 C4.2 492.47,2311.25 492.47,2264.24 CCD1.D4 ; C1.2 CCD1.A4 ; CCD1.A18 C2.2 1921.22,160 C14.1
  Bottom Layer (*.GBL) w10: C13.1 491.22,130 C1.2 ; CCD1.D18 CCD1.D18@1929.13,2236.22 ; C3.2 2064,2319 C15.1
VOG: C5.2 C6.2 C7.2 C8.2 CCD1.A5 CCD1.A17 CCD1.D5 CCD1.D17 P1.55 | length 1167.5
  Top Layer (*.GTL) w8: v1(609,2510) 635,2536 937.57,2536 v1(1009,2464.57)
  Mid-Layer 1  (*.G1) w8: v1(609,2510) 633,2486 633,2345.02 620.49,2332.51 CCD1.D5
  Bottom Layer (*.GBL) w8: P1.55 1008.94,2464.63 v1(1009,2464.57)
  Bottom Layer (*.GBL) w9.84: C5.2 CCD1.A5 ; CCD1.D5 620.49,2238.27 670.47,2288.25 C8.2 ; C7.2 1770.47,2286.24 CCD1.D17 ; C6.2 CCD1.A17
VRD: C9.2 C10.2 C11.2 C12.2 C17.1 C18.1 C19.1 C20.1 CCD1.B4 CCD1.B18 CCD1.C4 CCD1.C18 R11.2 | length 887.6
  Bottom Layer (*.GBL) w8: R11.2 422,1948 457.68,1983.68 457.68,2027.32 C20.1
  Bottom Layer (*.GBL) w9.84: C20.1 519.72,2060 C12.2@520.47,2059.25 ; C17.1 455.75,419.25 C9.2 ; CCD1.B4 C9.2 ; CCD1.B18 C10.2 2014.25,419.25 C18.1 ; CCD1.C18 C11.2 1921.22,2060 C19.1
  Bottom Layer (*.GBL) w10: C12.2@520.49,2059.27 CCD1.C4
pads on no net: P1.0 P1.4 P1.8 P1.32 P1.37 RTD1.0 RTD2.0 RTD3.0 RTD4.0
copper on no net: | length 914.8
  Bottom Layer (*.GBL) w10: 366.14,422.24 405.51,422.24 ; 385.83,403.54 386.81,404.53 386.81,441.93 ; 388.78,2006.89 428.15,2006.89 ; 396.65,68.9 436.02,68.9 ; 397.28,2374.13 436.65,2374.13 ; 408.46,1987.2 409.45,1988.19 409.45,2025.59 ; 416.34,50.2 417.32,51.18 417.32,88.58 ; 416.97,2354.45 417.95,2355.43 417.95,2392.83 ; 1993.63,94.67 2033,94.67 ; 1994.09,1999.02 2033.46,1999.02 ; 2005.54,481.23 2044.91,481.23 ; 2013.31,76.95 2014.3,77.94 2014.3,110.42 ; 2013.78,1979.33 2014.76,1980.31 2014.76,2017.72 ; 2025.23,462.53 2026.21,463.51 2026.21,500.91 ; 2084,2378 2123.37,2378 ; 2103.69,2359.3 2104.67,2360.28 2104.67,2397.69 ; 2327.86,1809 ccw(c2281,1809) 2327.86,1809

## Polygon pours and split planes (outlines as drawn)
VRD on Internal Plane 1 (*.GP1) (split plane): 1970.37,2180.14 1970.37,290.35 1878.57,290.35 1878.57,2083.25 1878.18,2085.2 1877.08,2086.86 1875.42,2087.96 1873.47,2088.35 566.47,2088.35 564.52,2087.96 562.87,2086.86 561.76,2085.2 561.37,2083.25 561.37,293.25 561.55,292.35 477.57,292.35 477.57,2179.14 482.58,2184.15 1966.36,2184.15
AGND on Internal Plane 1 (*.GP1) (split plane): 2375.23,2568.86 2387.59,2564.53 2398.69,2557.56 2407.95,2548.3 2414.93,2537.2 2419.25,2524.83 2420.85,2510.68 2420.85,79.87 2419.25,65.72 2414.93,53.35 2407.95,42.26 2398.69,32.99 2387.59,26.02 2375.23,21.69 2361.08,20.1 79.87,20.1 65.72,21.69 53.35,26.02 42.26,32.99 32.99,42.26 26.02,53.35 21.69,65.72 20.1,79.87 20.1,2510.68 21.69,2524.83 26.02,2537.2 32.99,2548.3 42.26,2557.56 53.35,2564.53 65.72,2568.86 79.87,2570.45 2361.08,2570.45
VOD on Internal Plane 2 (*.GP2) (split plane): 1960.37,195.35 1871.57,195.35 1871.57,2285.25 1871.18,2287.2 1870.08,2288.86 1868.42,2289.96 1866.47,2290.35 1864.52,2289.96 1863.61,2289.35 570.47,2289.35 568.52,2288.96 566.87,2287.86 564.87,2285.86 563.76,2284.2 563.37,2282.25 563.37,181.35 473.57,181.35 473.57,2331.52 1960.37,2331.52
VOG on Internal Plane 2 (*.GP2) (split plane): 1861.37,192.35 1680.57,192.35 1680.57,2190.25 1680.18,2192.2 1679.08,2193.86 1677.42,2194.96 1675.47,2195.35 1673.52,2194.96 1671.87,2193.86 1671.36,2193.35 826.47,2193.35 824.52,2192.96 822.87,2191.86 821.76,2190.2 821.37,2188.25 821.37,1564.25 821.37,181.35 573.57,181.35 573.57,2279.15 1861.37,2279.15
AGND on Internal Plane 2 (*.GP2) (split plane): 2375.23,2568.86 2387.59,2564.53 2398.69,2557.56 2407.95,2548.3 2414.93,2537.2 2419.25,2524.83 2420.85,2510.68 2420.85,79.87 2419.25,65.72 2414.93,53.35 2407.95,42.26 2398.69,32.99 2387.59,26.02 2375.23,21.69 2361.08,20.1 79.87,20.1 65.72,21.69 53.35,26.02 42.26,32.99 32.99,42.26 26.02,53.35 21.69,65.72 20.1,79.87 20.1,2510.68 21.69,2524.83 26.02,2537.2 32.99,2548.3 42.26,2557.56 53.35,2564.53 65.72,2568.86 79.87,2570.45 2361.08,2570.45

## Other copper
Top Layer (*.GTL):
  text "*.GTL - TOP LAYER GERBER DATA" at 442.91,-1512.78 h80
Mid-Layer 1  (*.G1):
  text "*.G1 - MID LAYER 1 GERBER DATA" at 442.91,-1500.93 h80
Mid-Layer 2 (*.G2):
  text "*.G2 - MID LAYER 2 GERBER DATA" at 442.91,-1506.85 h80
Bottom Layer (*.GBL):
  text "2013" at 2172,1789 h50
  text "C" at 2295,1789 h40
  text "LCOGTN" at 2221,1695 h50
  text "175-00029" at 2318,811 h50
  text "rev. 3" at 2308,726 h50
  text "*.GBL - BOTTOM LAYER GERBER DATA" at 442.91,-1500.93 h80
Internal Plane 1 (*.GP1) (plane layer: these items are gaps in the copper):
  lines w10: 472.47,289.25 474.47,287.25 572.47,287.25 566.47,293.25 566.47,2083.25 1873.47,2083.25 1873.47,285.25 1974.47,285.25 1975.47,286.25 1975.47,2182.25 1968.47,2189.25 480.47,2189.25 472.47,2181.25 472.47,289.25
  text "*.GP1 - INTERNAL PLANE LAYER 1 GERBER DATA" at 442.91,-1506.85 h80
Internal Plane 2 (*.GP2) (plane layer: these items are gaps in the copper):
  lines w10: 569.47,176.25 469.47,176.25 468.47,175.25 468.47,2336.61 1965.47,2336.61 1965.47,191.25 1966.47,190.25 1870.47,190.25 1867.47,187.25 ; 569.47,176.25 568.47,175.25 568.47,2282.25 570.47,2284.25 1865.47,2284.25 1866.47,2285.25 1866.47,188.25 1867.47,187.25 ; 569.47,176.25 826.47,176.25 826.47,1564.25 826.47,2188.25 1673.47,2188.25 1675.47,2190.25 1675.47,187.25 1867.47,187.25
  text "*.GP2 - INTERNAL PLANE LAYER 2 GERBER DATA" at 442.91,-1518.7 h80

## Silkscreen, mask and mechanical layers (free items; w line width, h text height)
Bottom Paste:
  text "*.GBP - BOTTOM-SIDE SOLDER PASTE MASK" at 442.91,-1495.02 h80
Mechanical 1:
  lines w2: 990,2473 1625,2473 1625.08,2429.13 1625,2386 992,2386
  lines w30: 0,935.19 0,2529.33 ; 0,947.19 0,78.74 ccw(c78.74,78.74) 78.74,0 1590.32,0 ; 0,2511.81 cw(c78.74,2511.81) 78.74,2590.55 2362.2,2590.55 cw(c2362.2,2511.81) 2440.94,2511.81 ; 1062.01,1466.54 cw(c1106.3,1466.54) 1106.3,1510.83 1333.66,1510.83 cw(c1333.66,1466.54) 1377.95,1466.54 1377.95,1003.94 cw(c1333.66,1003.94) 1333.66,959.65 1107.28,959.65 ; 1062.99,1466.54 1062.99,1004.92 ccw(c1107.28,1004.92) 1107.28,960.63 ; 1585.32,0 2362.2,0 ccw(c2362.2,78.74) 2440.94,78.74 2440.94,1839.19 ; 2440.94,1824.19 2440.94,2508.62
Mechanical 2:
  lines w10: -12869.13,-9564.51 8130.87,-9564.51 8130.87,6435.49 -12869.13,6435.49 -12869.13,-9564.51 ; 4075.87,-9458.51 ccw(c4125.87,-9458.51) 4125.87,-9508.51 4455.87,-9508.51 ccw(c4455.87,-9468.51) 4495.87,-9468.51 4495.87,-9298.51 ccw(c4455.87,-9298.51) 4455.87,-9258.51 4075.87,-9258.51 4075.87,-9458.51 ; 4075.87,-9168.51 ccw(c4125.87,-9168.51) 4125.87,-9218.51 8025.87,-9218.51 ccw(c8025.87,-9168.51) 8075.87,-9168.51 8075.87,-8978.51 ccw(c8025.87,-8978.51) 8025.87,-8928.51 4075.87,-8928.51 4075.87,-9168.51 ; 4075.87,-8838.51 ccw(c4125.87,-8838.51) 4125.87,-8888.51 6005.87,-8888.51 ccw(c6005.87,-8838.51) 6055.87,-8838.51 6055.87,-8688.51 ccw(c6005.87,-8688.51) 6005.87,-8638.51 4075.87,-8638.51 4075.87,-8838.51 ; 4075.87,-8558.51 ccw(c4115.87,-8558.51) 4115.87,-8598.51 4925.87,-8598.51 ccw(c4925.87,-8548.51) 4975.87,-8548.51 4975.87,-8398.51 ccw(c4925.87,-8398.51) 4925.87,-8348.51 4075.87,-8348.51 4075.87,-8558.51 ; 4535.87,-9468.51 ccw(c4575.87,-9468.51) 4575.87,-9508.51 6535.87,-9508.51 ccw(c6535.87,-9468.51) 6575.87,-9468.51 6575.87,-9298.51 ccw(c6535.87,-9298.51) 6535.87,-9258.51 4535.87,-9258.51 4535.87,-9468.51 ; 5015.87,-8548.51 ccw(c5065.87,-8548.51) 5065.87,-8598.51 6005.87,-8598.51 ccw(c6005.87,-8548.51) 6055.87,-8548.51 6055.87,-8398.51 ccw(c6005.87,-8398.51) 6005.87,-8348.51 5015.87,-8348.51 5015.87,-8548.51 ; 6095.87,-8838.51 ccw(c6145.87,-8838.51) 6145.87,-8888.51 8025.87,-8888.51 ccw(c8025.87,-8838.51) 8075.87,-8838.51 8075.87,-8688.51 ccw(c8025.87,-8688.51) 8025.87,-8638.51 6095.87,-8638.51 6095.87,-8838.51 ; 6095.87,-8548.51 ccw(c6145.87,-8548.51) 6145.87,-8598.51 7085.87,-8598.51 ccw(c7085.87,-8548.51) 7135.87,-8548.51 7135.87,-8398.51 ccw(c7085.87,-8398.51) 7085.87,-8348.51 6095.87,-8348.51 6095.87,-8548.51 ; 6615.87,-9458.51 ccw(c6665.87,-9458.51) 6665.87,-9508.51 6995.87,-9508.51 ccw(c6995.87,-9468.51) 7035.87,-9468.51 7035.87,-9298.51 ccw(c6995.87,-9298.51) 6995.87,-9258.51 6615.87,-9258.51 6615.87,-9458.51 ; 7075.87,-9468.51 ccw(c7115.87,-9468.51) 7115.87,-9508.51 8025.87,-9508.51 ccw(c8025.87,-9458.51) 8075.87,-9458.51 8075.87,-9308.51 ccw(c8025.87,-9308.51) 8025.87,-9258.51 7075.87,-9258.51 7075.87,-9468.51 ; 7175.87,-8548.51 ccw(c7225.87,-8548.51) 7225.87,-8598.51 8025.87,-8598.51 ccw(c8025.87,-8548.51) 8075.87,-8548.51 8075.87,-8398.51 ccw(c8025.87,-8398.51) 8025.87,-8348.51 7175.87,-8348.51 7175.87,-8548.51
  lines w19: -12319,-5052.5 -6944,-5052.5 ; -12319,-4709.6 -6944,-4709.6 ; -12379,-7444 ccw(c-12268,-7444) -12268,-7555 -6995,-7555 ccw(c-6995,-7444) -6884,-7444 -6884,-4342 ccw(c-6995,-4342) -6995,-4231 -12268,-4231 ccw(c-12268,-4342) -12379,-4342 -12379,-7444
  lines w20: -12849.06,-8918.64 cw(c-12799.13,-8993.51) -12799.13,-8903.51 -12339.13,-8903.51 cw(c-12339.13,-8993.51) -12249.13,-8993.51 -12249.13,-9043.51 ccw(c-12239.13,-9043.51) -12239.13,-9053.51 -9599.13,-9053.51 cw(c-9599.13,-9143.51) -9509.13,-9143.51 -9509.13,-9483.51 cw(c-9599.13,-9483.51) -9524.25,-9533.45 ; 4032.04,-9548.49 cw(c4125.87,-9458.51) 3995.87,-9458.51 3995.87,-7788.51 cw(c4125.87,-7788.51) 4125.87,-7658.51 8025.87,-7658.51 cw(c8025.87,-7788.51) 8114.53,-7693.44 ; -12849.13,-9483.51 ccw(c-12799.13,-9483.51) -12799.13,-9533.51 -9599.13,-9533.51 ccw(c-9599.13,-9483.51) -9549.13,-9483.51 -9549.13,-9143.51 ccw(c-9599.13,-9143.51) -9599.13,-9093.51 -12239.13,-9093.51 cw(c-12239.13,-9043.51) -12289.13,-9043.51 -12289.13,-8993.51 ccw(c-12339.13,-8993.51) -12339.13,-8943.51 -12799.13,-8943.51 ccw(c-12799.13,-8993.51) -12849.13,-8993.51 -12849.13,-9483.51 ; -5339.13,-9384.51 ccw(c-5209.13,-9384.51) -5209.13,-9514.51 -469.13,-9514.51 ccw(c-469.13,-9384.51) -339.13,-9384.51 -339.13,-7794.51 ccw(c-469.13,-7794.51) -469.13,-7664.51 -5209.13,-7664.51 ccw(c-5209.13,-7794.51) -5339.13,-7794.51 -5339.13,-9384.51 ; 4035.87,-9458.51 ccw(c4125.87,-9458.51) 4125.87,-9548.51 8025.87,-9548.51 ccw(c8025.87,-9458.51) 8115.87,-9458.51 8115.87,-7788.51 ccw(c8025.87,-7788.51) 8025.87,-7698.51 4125.87,-7698.51 ccw(c4125.87,-7788.51) 4035.87,-7788.51 4035.87,-9458.51
  lines w24: -2789.13,-9354.51 -2639.13,-9354.51 ; -2789.13,-9104.51 -2639.13,-9104.51 ; -2789.13,-8854.51 -2639.13,-8854.51 ; -2789.13,-8604.51 -2639.13,-8604.51 ; -2789.13,-8354.51 -2639.13,-8354.51
  lines w30: -13369.13,-10064.51 8630.87,-10064.51 8630.87,6935.49 -13369.13,6935.49 -13369.13,-10064.51
  lines w50: 4220.87,-8199.51 5870.87,-8199.51 ; 4220.87,-7819.51 5870.87,-7819.51 ; 5870.87,-8199.51 4210.87,-8199.51 4210.87,-7819.51 5870.87,-7819.51 ; 5870.87,-8199.51 5870.87,-7819.51
  text "NOTES (UNLESS OTHERWISE SPECIFIED):" at -12549.13,5911.49 h90
  text "GENERAL" at -12449.13,5711.49 h90
  text "1)" at -12349.13,5511.44 h75
  text "PCB IS 6-LAYER, .062\" THICK." at -12149.13,5511.46 h75
  text "2)" at -12349.13,5361.44 h75
  text "NO SOLDERMASK" at -12149.13,5361.44 h75
  text "3)" at -12349.13,5211.44 h75
  text "ACCEPTABILITY SHALL BE BASED ON IPC-A-600, CLASS 2." at -12149.13,5211.44 h75
  text "4)" at -12349.13,5061.44 h75
  text "THE FOLLOWING GERBER RS274X PHOTO TOOL FILES SHALL BE USED TO DEFINE ALL CIRCUIT FEATURES:" at -12149.13,5061.44 h75
  text "*.GTL - TOP LAYER GERBER DATA" at -11975.13,4871.49 h80
  text "*.G1 - MID LAYER 1 GERBER DATA" at -11975.13,4681.22 h80
  text "*.G2 - MID LAYER 2 GERBER DATA" at -11985,4506 h80
  text "*.GP1- INTERNAL PLANE LAYER 1 GERBER DATA" at -11979.13,4334.95 h80
  text "*.GP2 - INTERNAL PLANE LAYER 2 GERBER DATA" at -11979.13,4144.69 h80
  text "*.GBL - BOTTOM LAYER GERBER DATA" at -11993.17,3963.09 h80
  text "*.GBP - BOTTOM-SIDE SOLDER PASTE MASK" at -11983.33,3781.01 h80
  text "5)" at -12492.82,3615.35 h75
  text "THE PHOTO TOOL SHALL NOT BE COMPENSATED WITHOUT PRIOR ENGINEERING APPROVAL." at -12292.82,3615.35 h75
  text "PCB DESIGNER: RICH LOBDILL   PH (805) 880-1621  FAX (805) 961-1792." at -12292.82,3465.4 h75
  text "FABRICATION TOLERANCES" at -12391.13,1353.49 h90
  text "6)" at -12291.13,1153.44 h75
  text "END PRODUCT CONDUCTOR WIDTHS AND PAD DIAMETERS SHALL NOT VARY MORE THAN" at -12091.13,1153.44 h75
  text "0.002\" FROM THE 1:1 DIMENSIONS OF THE MASTER ARTWORK." at -12091.13,1003.49 h75
  text "7)" at -12291.13,853.44 h75
  text "THE CONDUCTIVE PATTERN SHALL BE POSITIONED SO THAT THE LOCATION OF ANY PAD OR" at -12091.13,853.44 h75
  text "LAND SHALL BE WITHIN 0.005\" DIAMETER TO THE TRUE POSITION OF THE HOLE IT CIRCUMSCRIBES." at -12091.13,703.49 h75
  text "8)" at -12291.13,553.44 h75
  text "ALL DRILL HOLE SIZES AND TOLERANCES APPLY AFTER PLATING." at -12091.13,553.44 h75
  text "9)" at -12291.13,403.44 h75
  text "THE MINIMUM ANNULAR RING SHALL BE 0.005\"." at -12091.13,403.44 h75
  text "10)" at -12346.13,253.44 h75
  text "BOW AND TWIST SHALL NOT EXCEED 0.010\" PER INCH." at -12091.13,253.44 h75
  text "11)" at -12336.13,103.44 h75
  text "FOR PCB ROUTING DIMENSIONS: .XXX = +/-.005\"  .XX = +/-.020\"" at -12091.13,103.44 h75
  text "MATERIAL" at -12391.13,-96.51 h90
  text "BASE LAMINATE: POLYIMIDE" at -12091.54,-285.43 h75
  text "12)" at -12346.13,-296.56 h75
  text "SEE STACK-UP LEGEND FOR COPPER CLADDING CALL OUTS" at -12084.13,-442.51 h75
  text "13)" at -12346.13,-446.56 h75
  text "PLATING" at -12391.13,-646.51 h90
  text "14)" at -12346.13,-841.56 h75
  text "ALL HOLES AND CONDUCTIVE SURFACES SHALL BE PLATED WITH A MINIMUM OF 0.001\" COPPER." at -12091.13,-841.56 h75
  text "15)" at -12346.13,-991.56 h75
  text "ALL EXPOSED HOLES AND CONDUCTIVE SURFACES SHALL BE COATED" at -12091.13,-991.56 h75
  text "WITH A GOLD IMMERSION PLATING TO PRESERVE SOLDERABILITY." at -12084.13,-1142.51 h75
  text "COATINGS" at -12391.13,-1341.51 h90
  text "16)" at -12341.13,-1536.56 h75
  text "17)" at -12346.13,-1686.56 h75
  text "MARKING" at -12391.13,-2036.51 h90
  text "18)" at -12346.13,-2231.56 h75
  text "NO INK MARKING IS TO BE USED" at -12096.46,-2250 h75
  text "19)" at -12346.13,-2381.56 h75
  text "ETCHED MARKING IS ACCEPTABLE" at -12106.3,-2407.48 h75
  text "20)" at -12356.13,-2681.56 h75
  text "ELECTRICAL TESTING" at -12391.13,-3031.51 h90
  text "21)" at -12346.13,-3226.56 h75
  text "ALL BOARDS SHALL BE ELECTRICALLY TESTED TO THE SUPPLIED IPC-D-356A NET LIST" at -12091.13,-3226.56 h75
  text "FOR CONTINUITY, OPENS AND SHORTS." at -12091.13,-3376.51 h75
  text "Layer Stack Up Detail for: 175-00029 rev3, 486 CCD Interface.PcbDoc" at -12319,-4524 h79
  text "Layer" at -12319,-4837.6 h79
  text "Copper Cladding" at -9397,-4930 h120
  text "Name" at -12319,-4995.6 h79
  text "Top Layer (*.GTL)" at -12319,-5253.08 h111
  text "1/2 oz (1 oz. finished)" at -9352,-5284 h100
  text "1/2 oz" at -9401,-5625 h100
  text "Mid-Layer 1  (*.G1)" at -12319,-5635.25 h111
  text "1/2 oz" at -9352,-5926 h100
  text "Internal Plane 1 (*.GP1)" at -12319,-6017.42 h111
  text "1/2 oz" at -9401,-6337 h100
  text "Mid-Layer 2 (*.G2)" at -12319,-6399.58 h111
  text "1/2 oz" at -9335,-6765 h100
  text "Internal Plane 2 (*.GP2)" at -12319,-6781.75 h111
  text "Bottom Layer (*.GBL)" at -12319,-7163.92 h111
  text "1/2 oz (1 oz. finished)" at -9319,-7193 h100
  text "Las Cumbres Observatory, Inc." at 6040.87,-7839.51 h90
  text "Las Cumbres Observatory" at 4270.87,-7959.51 h150
  text "PRIMARY PCB SPECIFICATIONS" at -4892.13,-7974.51 h200
  text "6740 Cortona Dr." at 6480.87,-7993.51 h90
  text "Global Telescope Network" at 4430.87,-8119.51 h125
  text "Goleta, CA 93117" at 6430.87,-8143.51 h90
  text "(REFER TO COMPLETE SPEC LISTING AT LEFT FOR FURTHER DETAILS)" at -5239.13,-8179.51 h100
  text "www.lcogt.net" at 6570.87,-8289.51 h90
  text "DATE" at 4095.87,-8400.31 h32
  text "DESIGNED" at 5035.87,-8400.31 h32
  text "DRAWN" at 6115.87,-8400.31 h32
  text "SCALE" at 7195.87,-8400.31 h32
  text "NUMBER OF LAYERS" at -5139.13,-8429.51 h150
  text "6" at -1589.13,-8429.53 h150
  text "Rich Lobdill" at 6420.87,-8499.51 h55
  text "Rich Lobdill" at 5295.87,-8504.51 h55
  text "1 : 1" at 7480.87,-8518.51 h90
  text "7/16/2013" at 4125.87,-8525.51 h90
  text "FINISHED THICKNESS" at -5139.13,-8679.51 h150
  text ".062\"" at -1764.13,-8679.51 h150
  text "CHECKED/DATE" at 4095.87,-8690.31 h32
  text "APPROVED/DATE" at 6115.87,-8690.31 h32
  text "POLYIMIDE" at -1947.83,-8896.65 h130
  text "BASE MATERIAL" at -5139.13,-8929.51 h150
  text "TITLE" at 4095.87,-8980.31 h32
  text "NOTICE" at -12794.13,-9088.51 h100
  text "175-00029, PCB, 486 CCD Interface" at 4315.87,-9124.51 h100
  text "GOLD IMMERSION" at -2333.13,-9146.51 h150
  text "PLATING TYPE" at -5139.13,-9179.51 h150
  text "THIS DRAWING EMBODIES A PROPRIETARY DESIGN OWNED BY LAS CUMBRES" at -12759.13,-9203.51 h60
  text "OBSERVATORY.  IT IS SUBMITTED FOR A SPECIFIC PURPOSE UNDER A CON-" at -12759.13,-9303.51 h60
  text "SIZE" at 4095.87,-9310.31 h32
  text "DOC NO." at 4555.87,-9310.31 h32
  text "REV" at 6635.87,-9310.31 h32
  text "SHEET" at 7095.87,-9310.31 h32
  text "FIDENTIAL RELATIONSHIP, AND EXCEPT FOR PURPOSES EXPRESSLY GRANTED" at -12759.13,-9398.51 h60
  text "OF" at 7525.87,-9413.51 h60
  text "SOLDER MASK COLOR" at -5139.13,-9429.51 h150
  text "NONE" at -1714.13,-9429.51 h150
  text "1" at 7355.87,-9433.51 h100
  text "X" at 7755.87,-9433.51 h100
  text "3" at 6780.87,-9446.51 h130
  text "-" at 5110.87,-9448.51 h130
  text "GPT" at 5830.6,-9463.31 h130
  text "C" at 4230.87,-9464.51 h100
  text "IN WRITING, ALL RIGHTS ARE RESERVED BY LAS CUMBRES OBSERVATORY." at -12759.13,-9488.51 h60
Mechanical 3:
  lines w8: -1568.73,-280.66 -1568.73,-273.66
Mechanical 5:
  text "175-00029 rev3, 486 CCD Interface" at 710.2,-1024.52 h80
  text "LAS CUMBRES OBSERVATORY     7/16/2013" at 710.2,-1174.54 h80
Drill Drawing:
  lines w10: -12869.13,-9564.51 8130.87,-9564.51 8130.87,6435.49 -12869.13,6435.49 -12869.13,-9564.51 ; 4075.87,-9458.51 ccw(c4125.87,-9458.51) 4125.87,-9508.51 4455.87,-9508.51 ccw(c4455.87,-9468.51) 4495.87,-9468.51 4495.87,-9298.51 ccw(c4455.87,-9298.51) 4455.87,-9258.51 4075.87,-9258.51 4075.87,-9458.51 ; 4075.87,-9168.51 ccw(c4125.87,-9168.51) 4125.87,-9218.51 8025.87,-9218.51 ccw(c8025.87,-9168.51) 8075.87,-9168.51 8075.87,-8978.51 ccw(c8025.87,-8978.51) 8025.87,-8928.51 4075.87,-8928.51 4075.87,-9168.51 ; 4075.87,-8848.51 ccw(c4115.87,-8848.51) 4115.87,-8888.51 5535.87,-8888.51 ccw(c5535.87,-8838.51) 5585.87,-8838.51 5585.87,-8688.51 ccw(c5535.87,-8688.51) 5535.87,-8638.51 4075.87,-8638.51 4075.87,-8848.51 ; 4535.87,-9468.51 ccw(c4575.87,-9468.51) 4575.87,-9508.51 6535.87,-9508.51 ccw(c6535.87,-9468.51) 6575.87,-9468.51 6575.87,-9298.51 ccw(c6535.87,-9298.51) 6535.87,-9258.51 4535.87,-9258.51 4535.87,-9468.51 ; 5625.87,-8838.51 ccw(c5675.87,-8838.51) 5675.87,-8888.51 7085.87,-8888.51 ccw(c7085.87,-8838.51) 7135.87,-8838.51 7135.87,-8688.51 ccw(c7085.87,-8688.51) 7085.87,-8638.51 5625.87,-8638.51 5625.87,-8838.51 ; 6615.87,-9458.51 ccw(c6665.87,-9458.51) 6665.87,-9508.51 6995.87,-9508.51 ccw(c6995.87,-9468.51) 7035.87,-9468.51 7035.87,-9298.51 ccw(c6995.87,-9298.51) 6995.87,-9258.51 6615.87,-9258.51 6615.87,-9458.51 ; 7075.87,-9468.51 ccw(c7115.87,-9468.51) 7115.87,-9508.51 8025.87,-9508.51 ccw(c8025.87,-9458.51) 8075.87,-9458.51 8075.87,-9308.51 ccw(c8025.87,-9308.51) 8025.87,-9258.51 7075.87,-9258.51 7075.87,-9468.51 ; 7175.87,-8838.51 ccw(c7225.87,-8838.51) 7225.87,-8888.51 8025.87,-8888.51 ccw(c8025.87,-8838.51) 8075.87,-8838.51 8075.87,-8688.51 ccw(c8025.87,-8688.51) 8025.87,-8638.51 7175.87,-8638.51 7175.87,-8838.51
  lines w20: -12844.06,-8933.64 cw(c-12794.13,-9008.51) -12794.13,-8918.51 -12334.13,-8918.51 cw(c-12334.13,-9008.51) -12244.13,-9008.51 -12244.13,-9058.51 ccw(c-12234.13,-9058.51) -12234.13,-9068.51 -9594.13,-9068.51 cw(c-9594.13,-9158.51) -9504.13,-9158.51 -9504.13,-9498.51 cw(c-9594.13,-9498.51) -9519.25,-9548.45 ; 4030.8,-9547.17 cw(c4125.87,-9458.51) 3995.87,-9458.51 3995.87,-8638.51 cw(c4075.87,-8638.51) 4075.87,-8558.51 8025.87,-8558.51 cw(c8025.87,-8688.51) 8114.53,-8593.44 ; -12844.13,-9498.51 ccw(c-12794.13,-9498.51) -12794.13,-9548.51 -9594.13,-9548.51 ccw(c-9594.13,-9498.51) -9544.13,-9498.51 -9544.13,-9158.51 ccw(c-9594.13,-9158.51) -9594.13,-9108.51 -12234.13,-9108.51 cw(c-12234.13,-9058.51) -12284.13,-9058.51 -12284.13,-9008.51 ccw(c-12334.13,-9008.51) -12334.13,-8958.51 -12794.13,-8958.51 ccw(c-12794.13,-9008.51) -12844.13,-9008.51 -12844.13,-9498.51 ; 4035.87,-9458.51 ccw(c4125.87,-9458.51) 4125.87,-9548.51 8025.87,-9548.51 ccw(c8025.87,-9458.51) 8115.87,-9458.51 8115.87,-8688.51 ccw(c8025.87,-8688.51) 8025.87,-8598.51 4075.87,-8598.51 ccw(c4075.87,-8638.51) 4035.87,-8638.51 4035.87,-9458.51
  lines w30: -13369.13,-10064.51 8630.87,-10064.51 8630.87,6935.49 -13369.13,6935.49 -13369.13,-10064.51
  text ".Legend" at -2395.13,-5447.51 h100
  text "DESIGNED" at 4095.87,-8690.31 h32
  text "DRAWN" at 5645.87,-8690.31 h32
  text "SCALE" at 7195.87,-8690.31 h32
  text "Rich Lobdill" at 4581.87,-8786.51 h55
  text "Rich Lobdill" at 6142.87,-8788.51 h55
  text "1 : 1" at 7480.87,-8808.51 h90
  text "TITLE" at 4095.87,-8980.31 h32
  text "NOTICE" at -12789.13,-9103.51 h100
  text "175-00029, PCB, 486 CCD Interface" at 4312.87,-9124.51 h100
  text "THIS DRAWING EMBODIES A PROPRIETARY DESIGN OWNED BY LAS CUMBRES" at -12754.13,-9218.51 h60
  text "SIZE" at 4095.87,-9310.31 h32
  text "DOC NO." at 4555.87,-9310.31 h32
  text "REV" at 6635.87,-9310.31 h32
  text "SHEET" at 7095.87,-9310.31 h32
  text "OBSERVATORY.  IT IS SUBMITTED FOR A SPECIFIC PURPOSE UNDER A CON-" at -12754.13,-9318.51 h60
  text "FIDENTIAL RELATIONSHIP, AND EXCEPT FOR PURPOSES EXPRESSLY GRANTED" at -12754.13,-9413.51 h60
  text "OF" at 7525.87,-9413.51 h60
  text "2" at 7340.87,-9433.51 h100
  text "X" at 7755.87,-9433.51 h100
  text "-" at 5110.87,-9448.51 h130
  text "3" at 6775.87,-9448.51 h130
  text "C" at 4230.87,-9464.51 h120
  text "GD1" at 5930.87,-9464.51 h120
  text "IN WRITING, ALL RIGHTS ARE RESERVED BY LAS CUMBRES OBSERVATORY." at -12754.13,-9503.51 h60

## Dimensions
0,2529.33 to 1377.95,1466.54 on Mechanical 2
0,2529.33 to 1062.99,1466.54 on Mechanical 2
2440.94,0 to 1406.5,1511.81 on Mechanical 2
2440.94,0 to 1442.91,960.63 on Mechanical 2
220.49,236.22 to 2220.49,236.22 on Mechanical 2
220.49,236.22 to 220.49,2236.22 on Mechanical 2
0,0 to 2440.94,0 on Mechanical 2
0,0 to 220.49,236.22 on Mechanical 2
0,0 to 220.49,236.22 on Mechanical 2
0,0 to 78.74,2590.55 on Mechanical 2
2421.26,2580.71 to 2577.76,2711.61 on Mechanical 2

## Text inside footprints (layer, text, board x,y; h text height)
P1: Bottom Layer (*.GBL) "2" at 1593.47,2218.25 h30; Bottom Layer (*.GBL) "1" at 1741.47,2538.25 h30
Q1: Bottom Layer (*.GBL) "1" at 2354,1250 h40
Q2: Bottom Layer (*.GBL) "1" at 357,1277 h40